# Altium PCB MAX96724_COUPON.PcbDoc (part 1 of 3)
Units mm, origin at the board's own origin, x right, y up, seen from the top; angles counter-clockwise.
Board outline 95 x 90 mm, 4 copper layers (TOP, INT1, INT2, BOT), stack 1.586 mm thick; 171 components, 127 nets, 532 pads, 121 vias.
Unrouted connection lines stored in the file: 1.
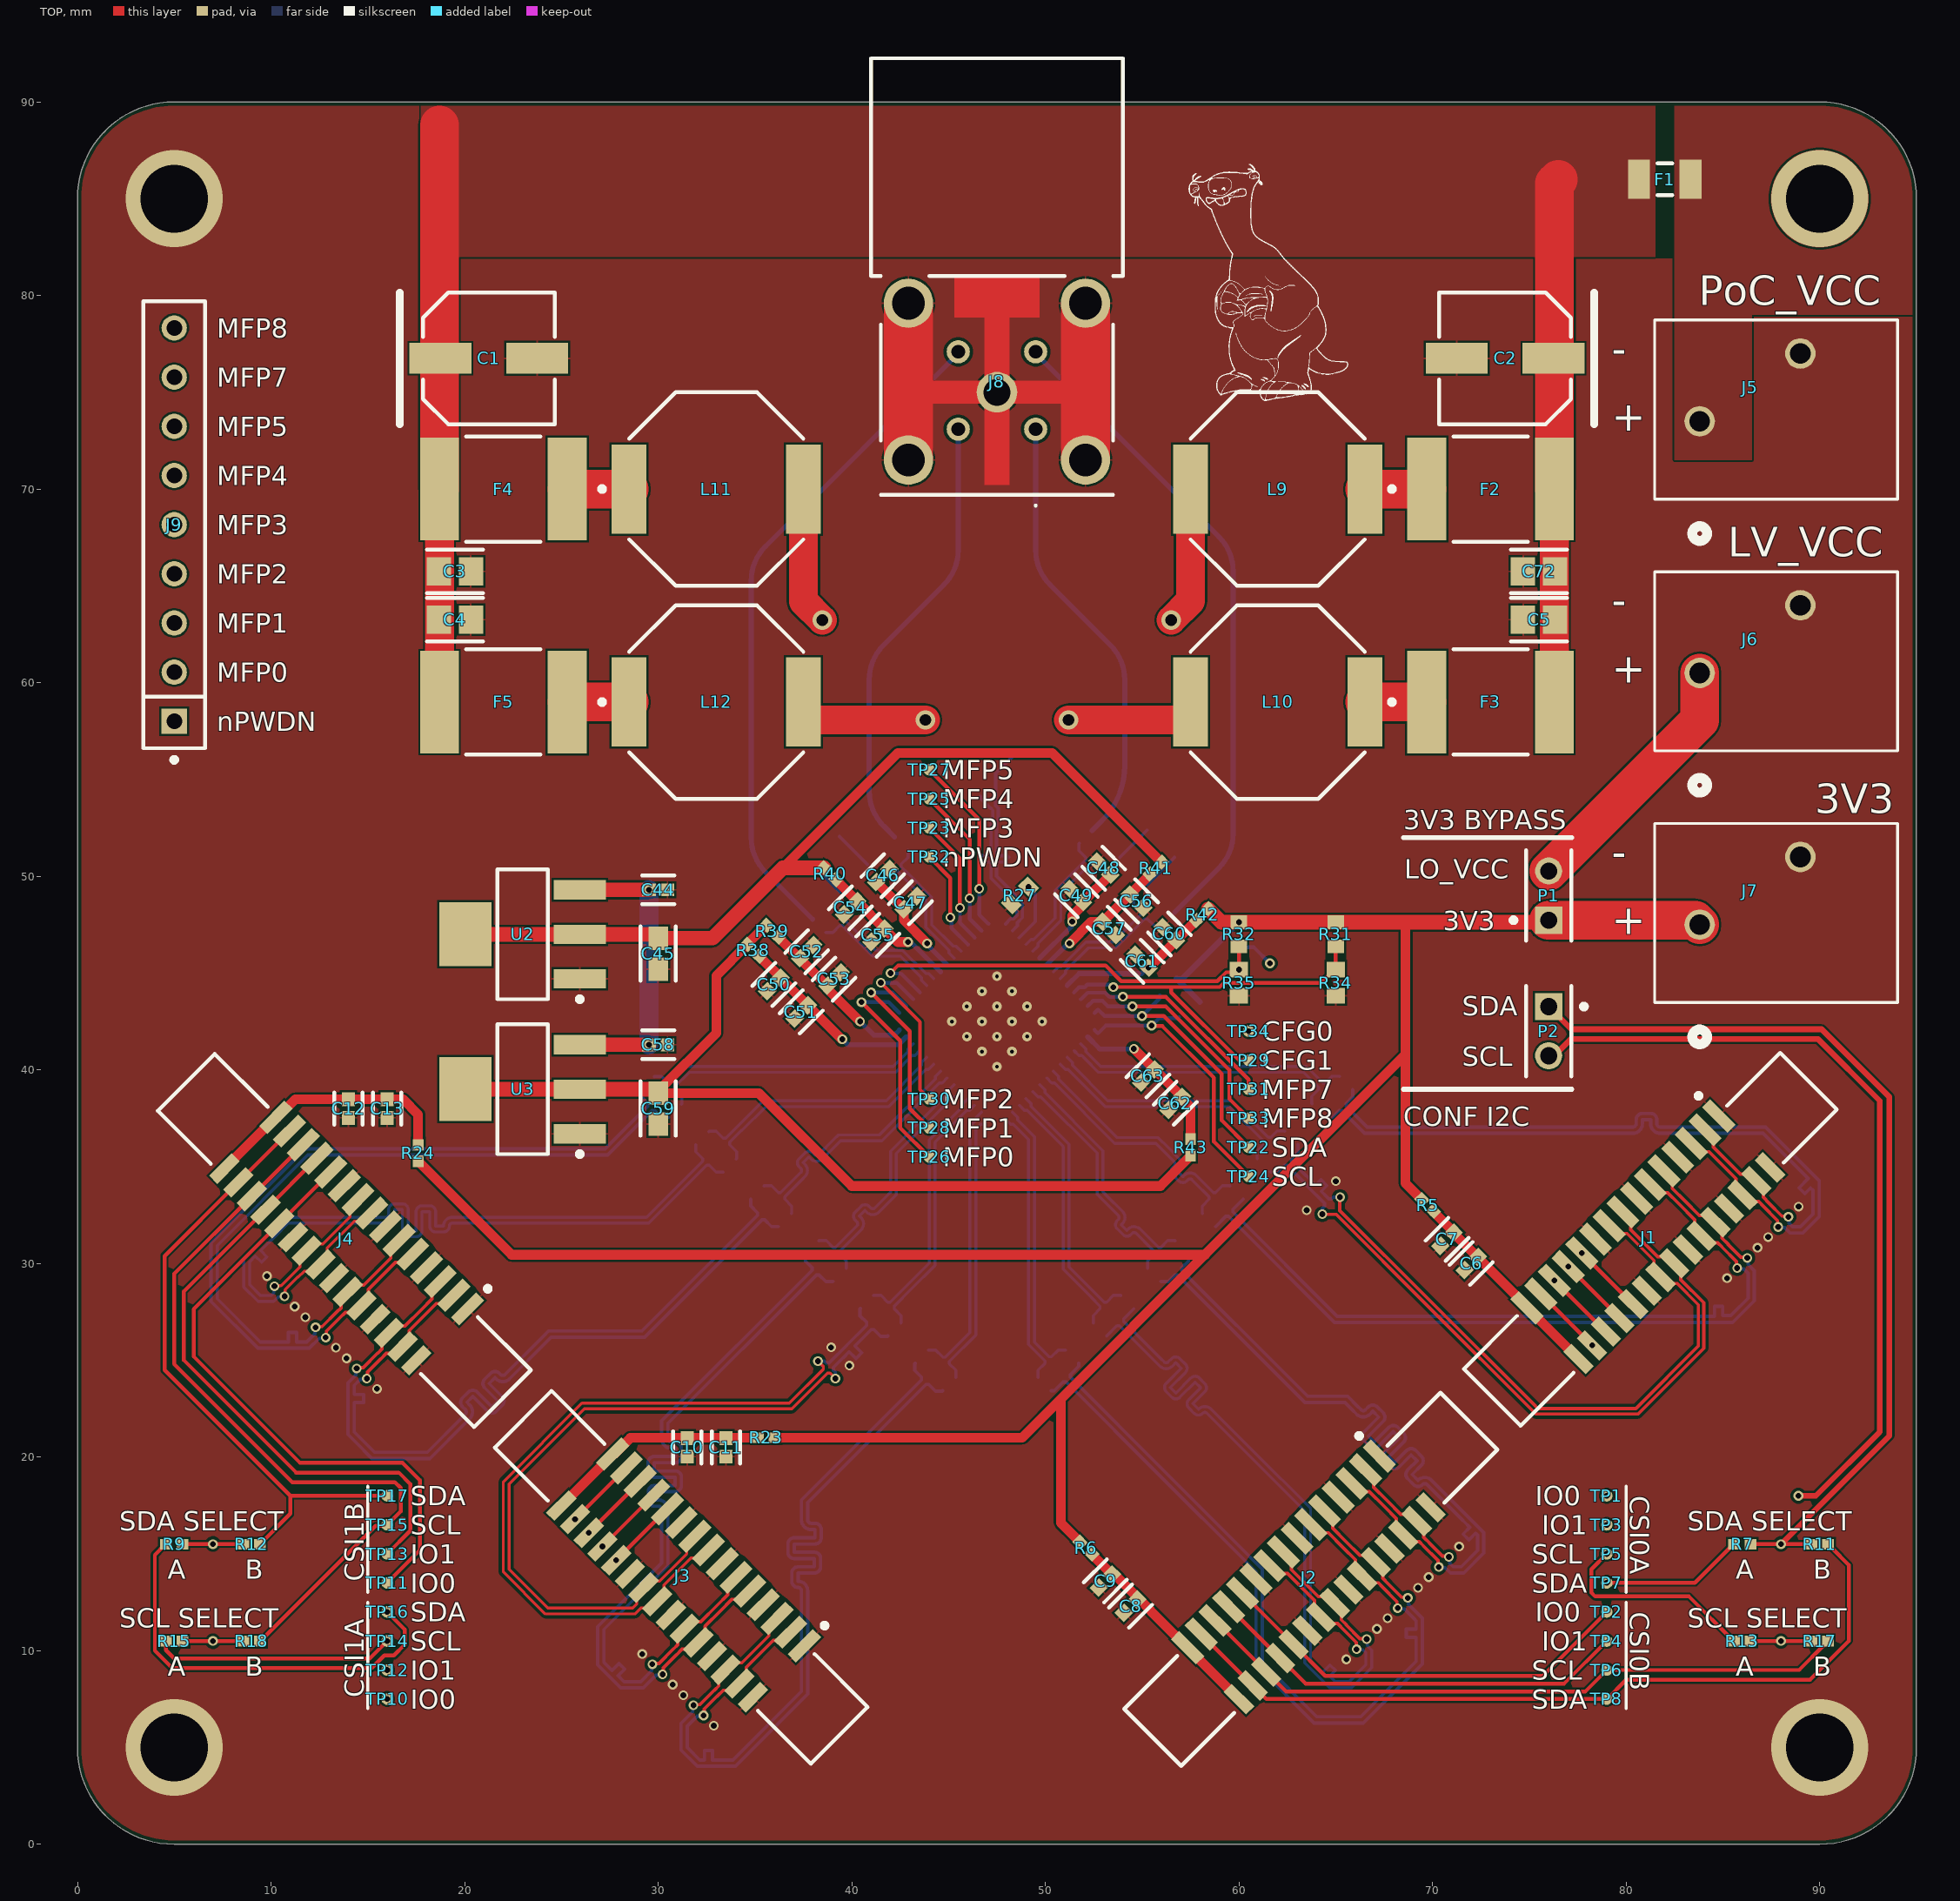
[diagram p0: TOP view]
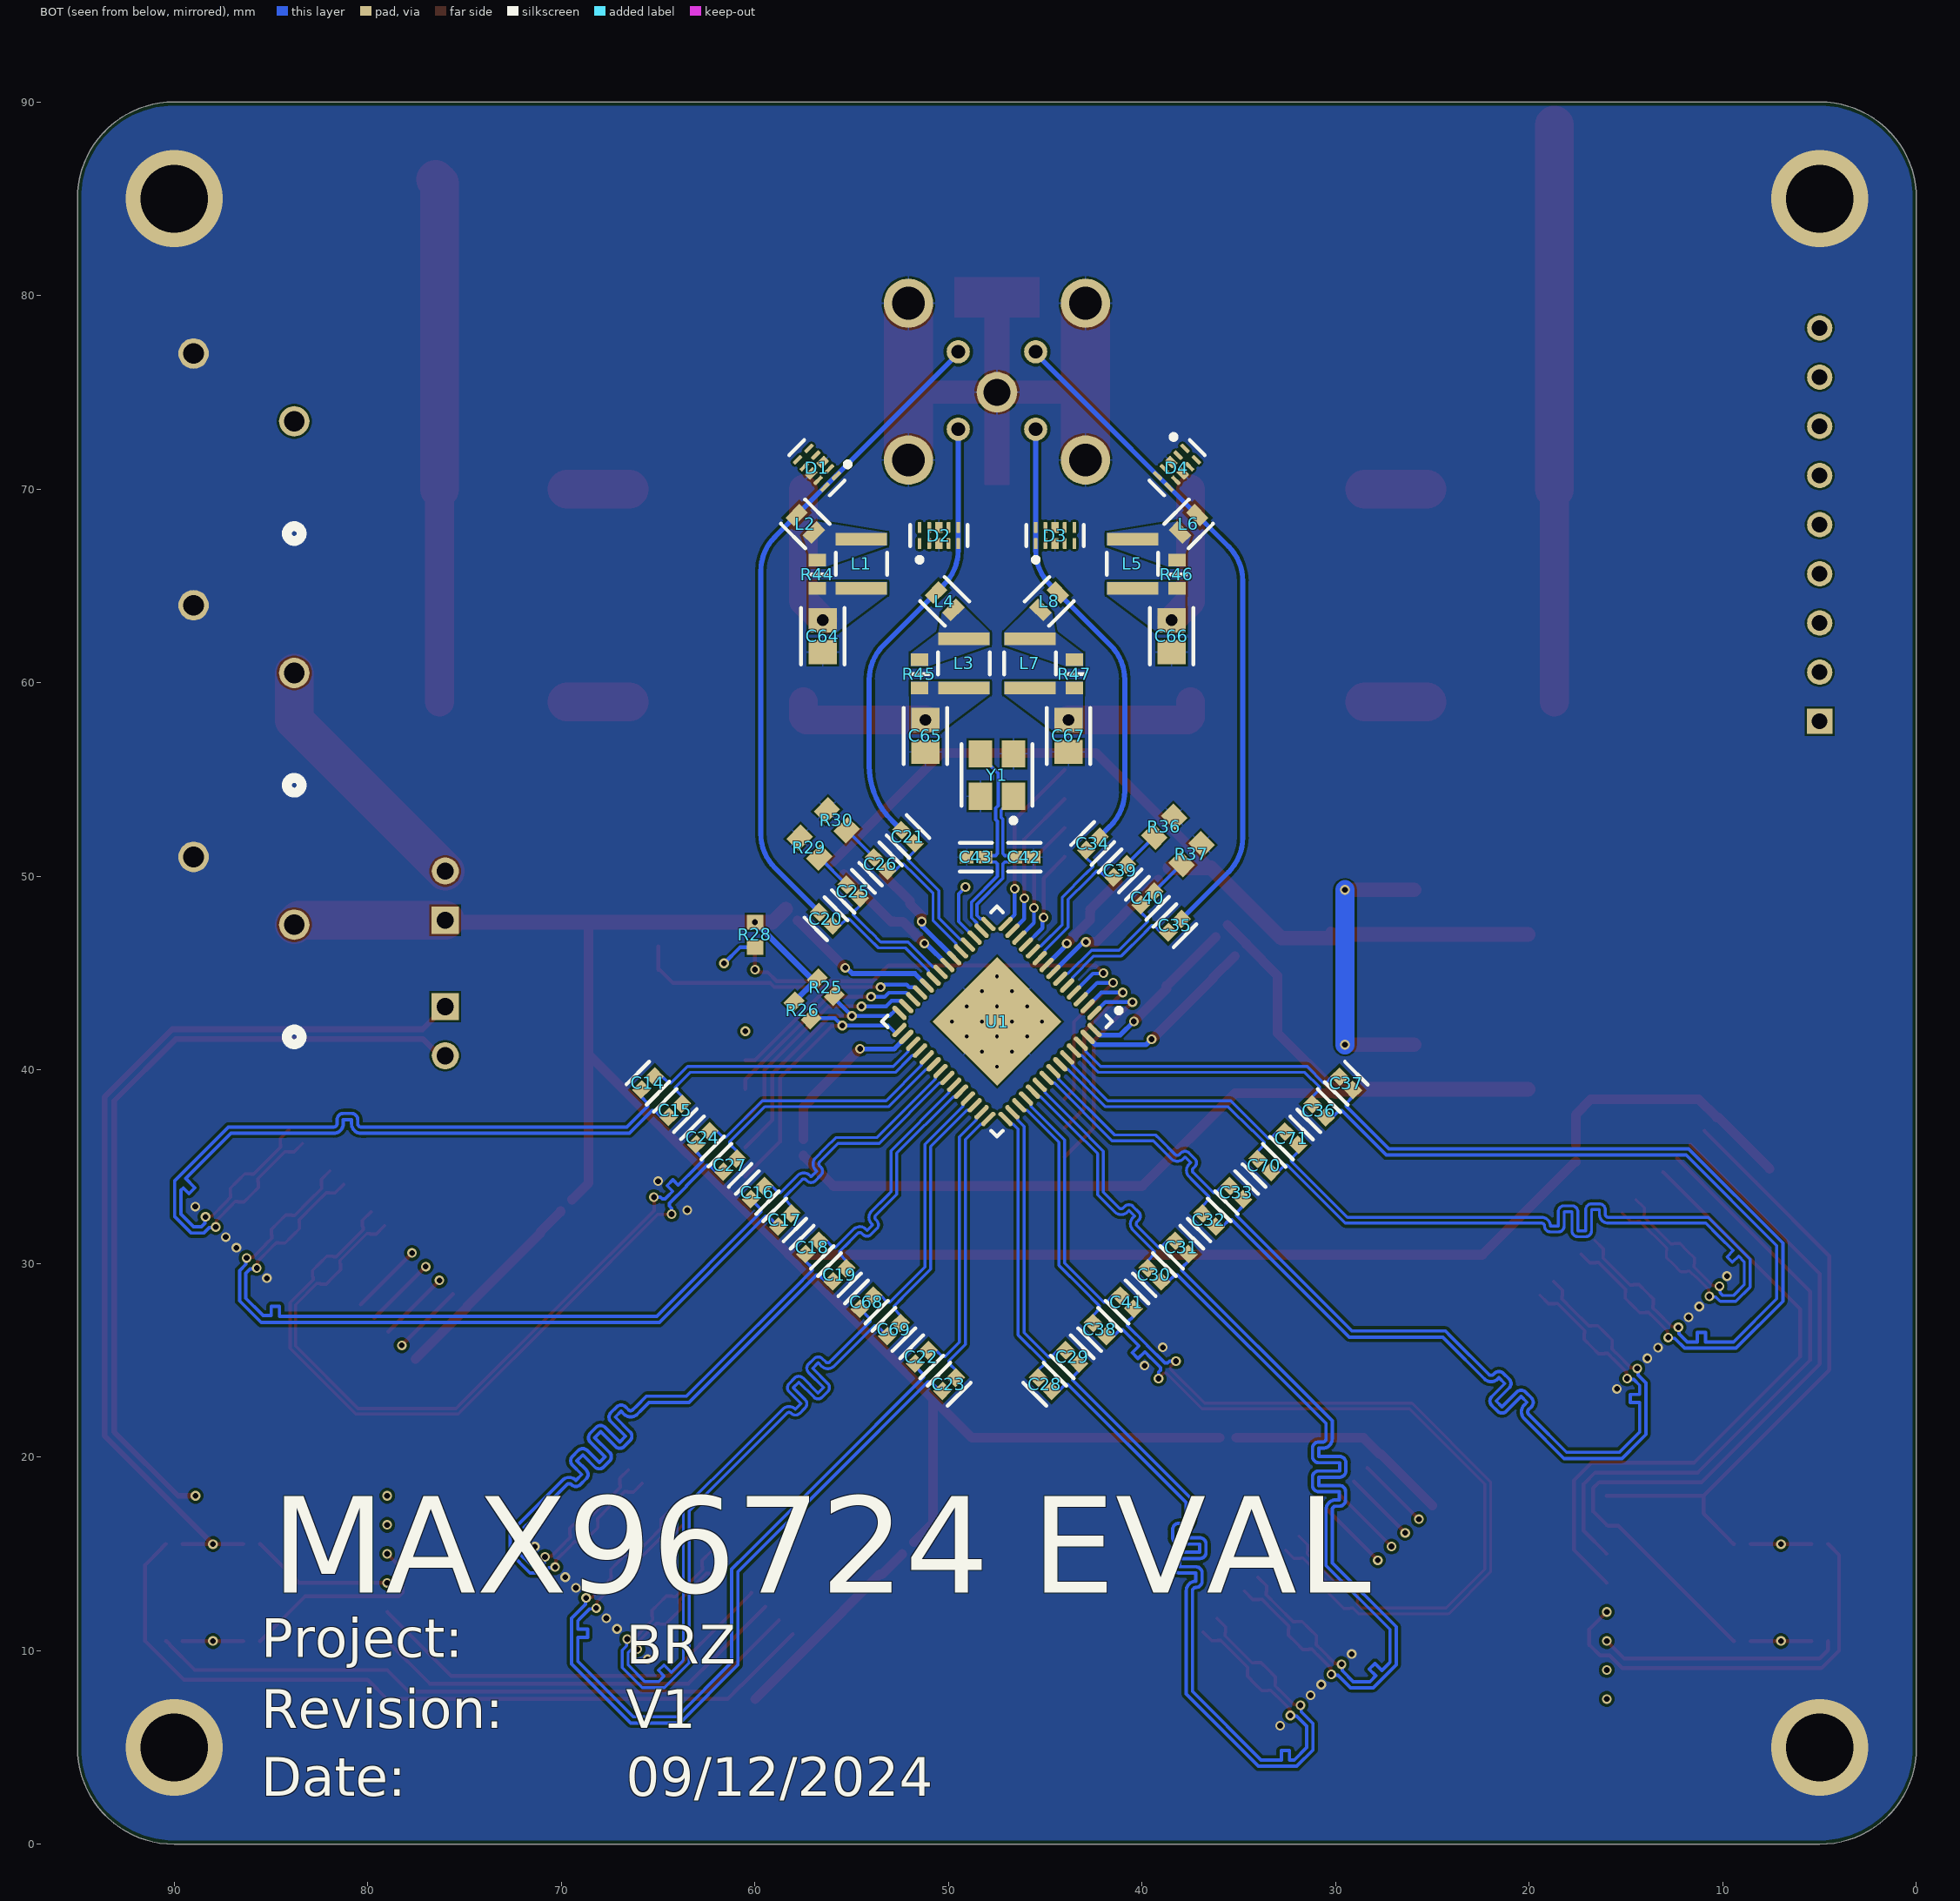
[diagram p1: BOT view, seen from below]
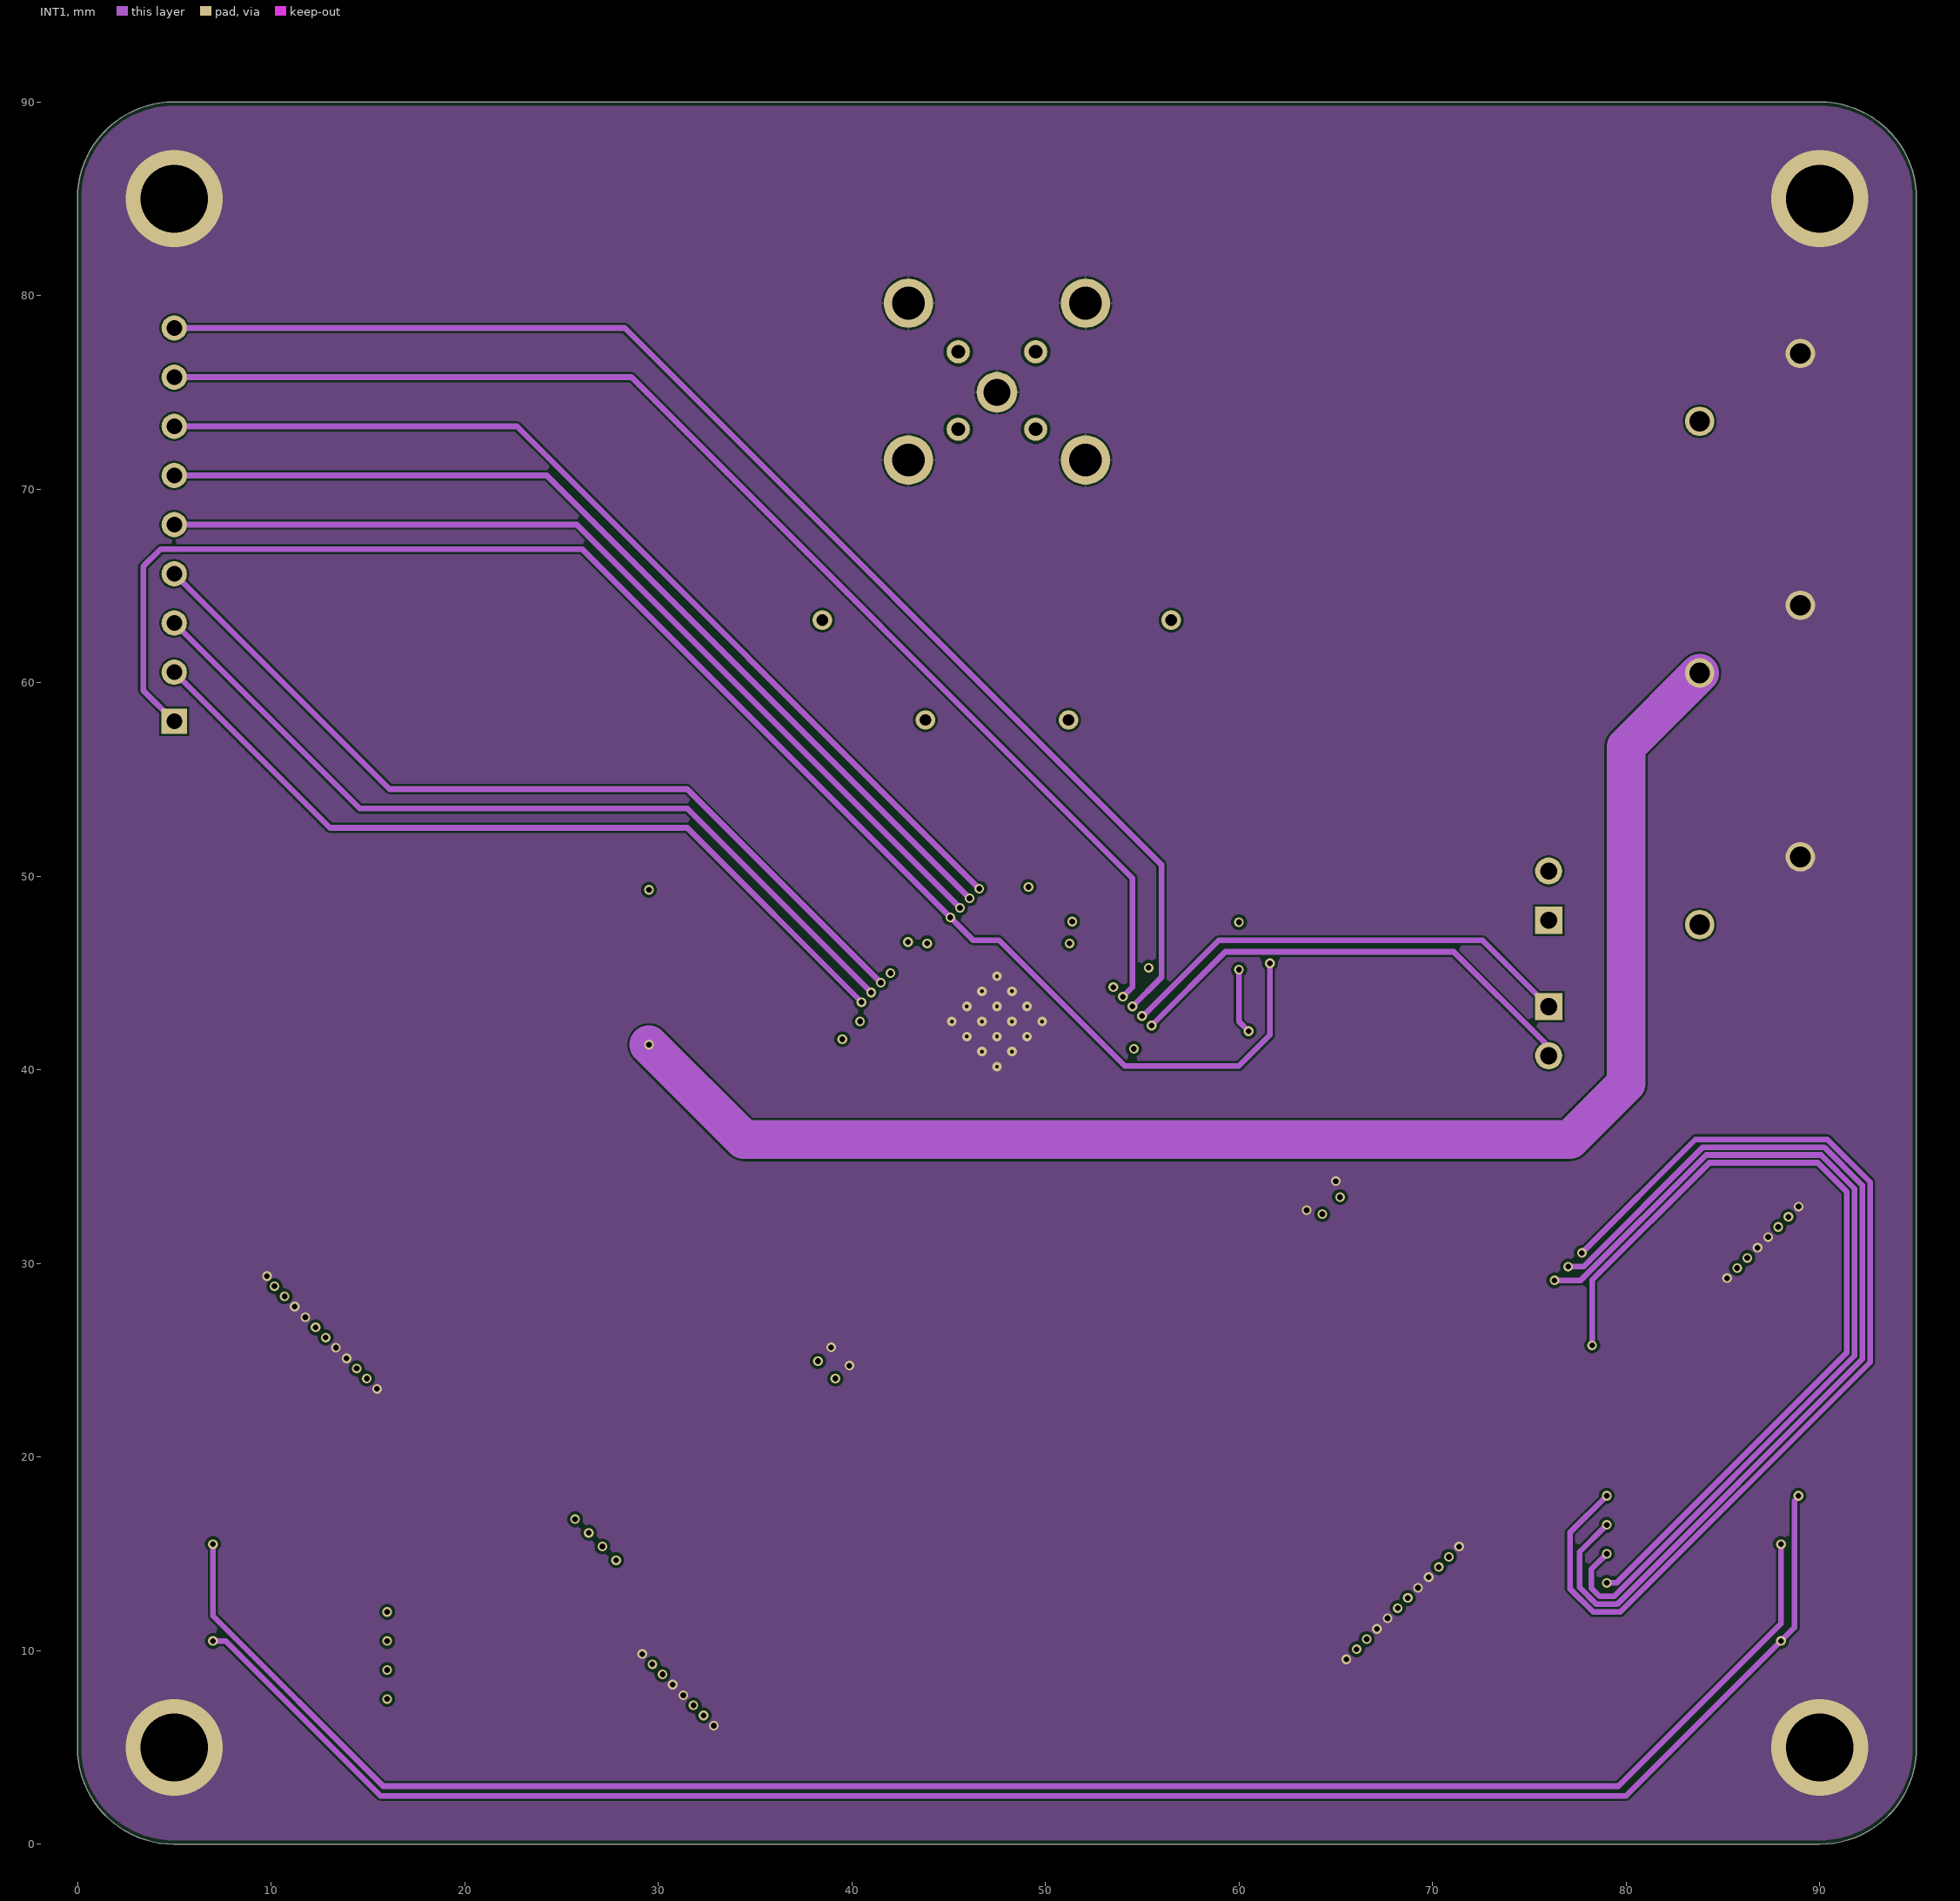
[diagram p2: INT1]
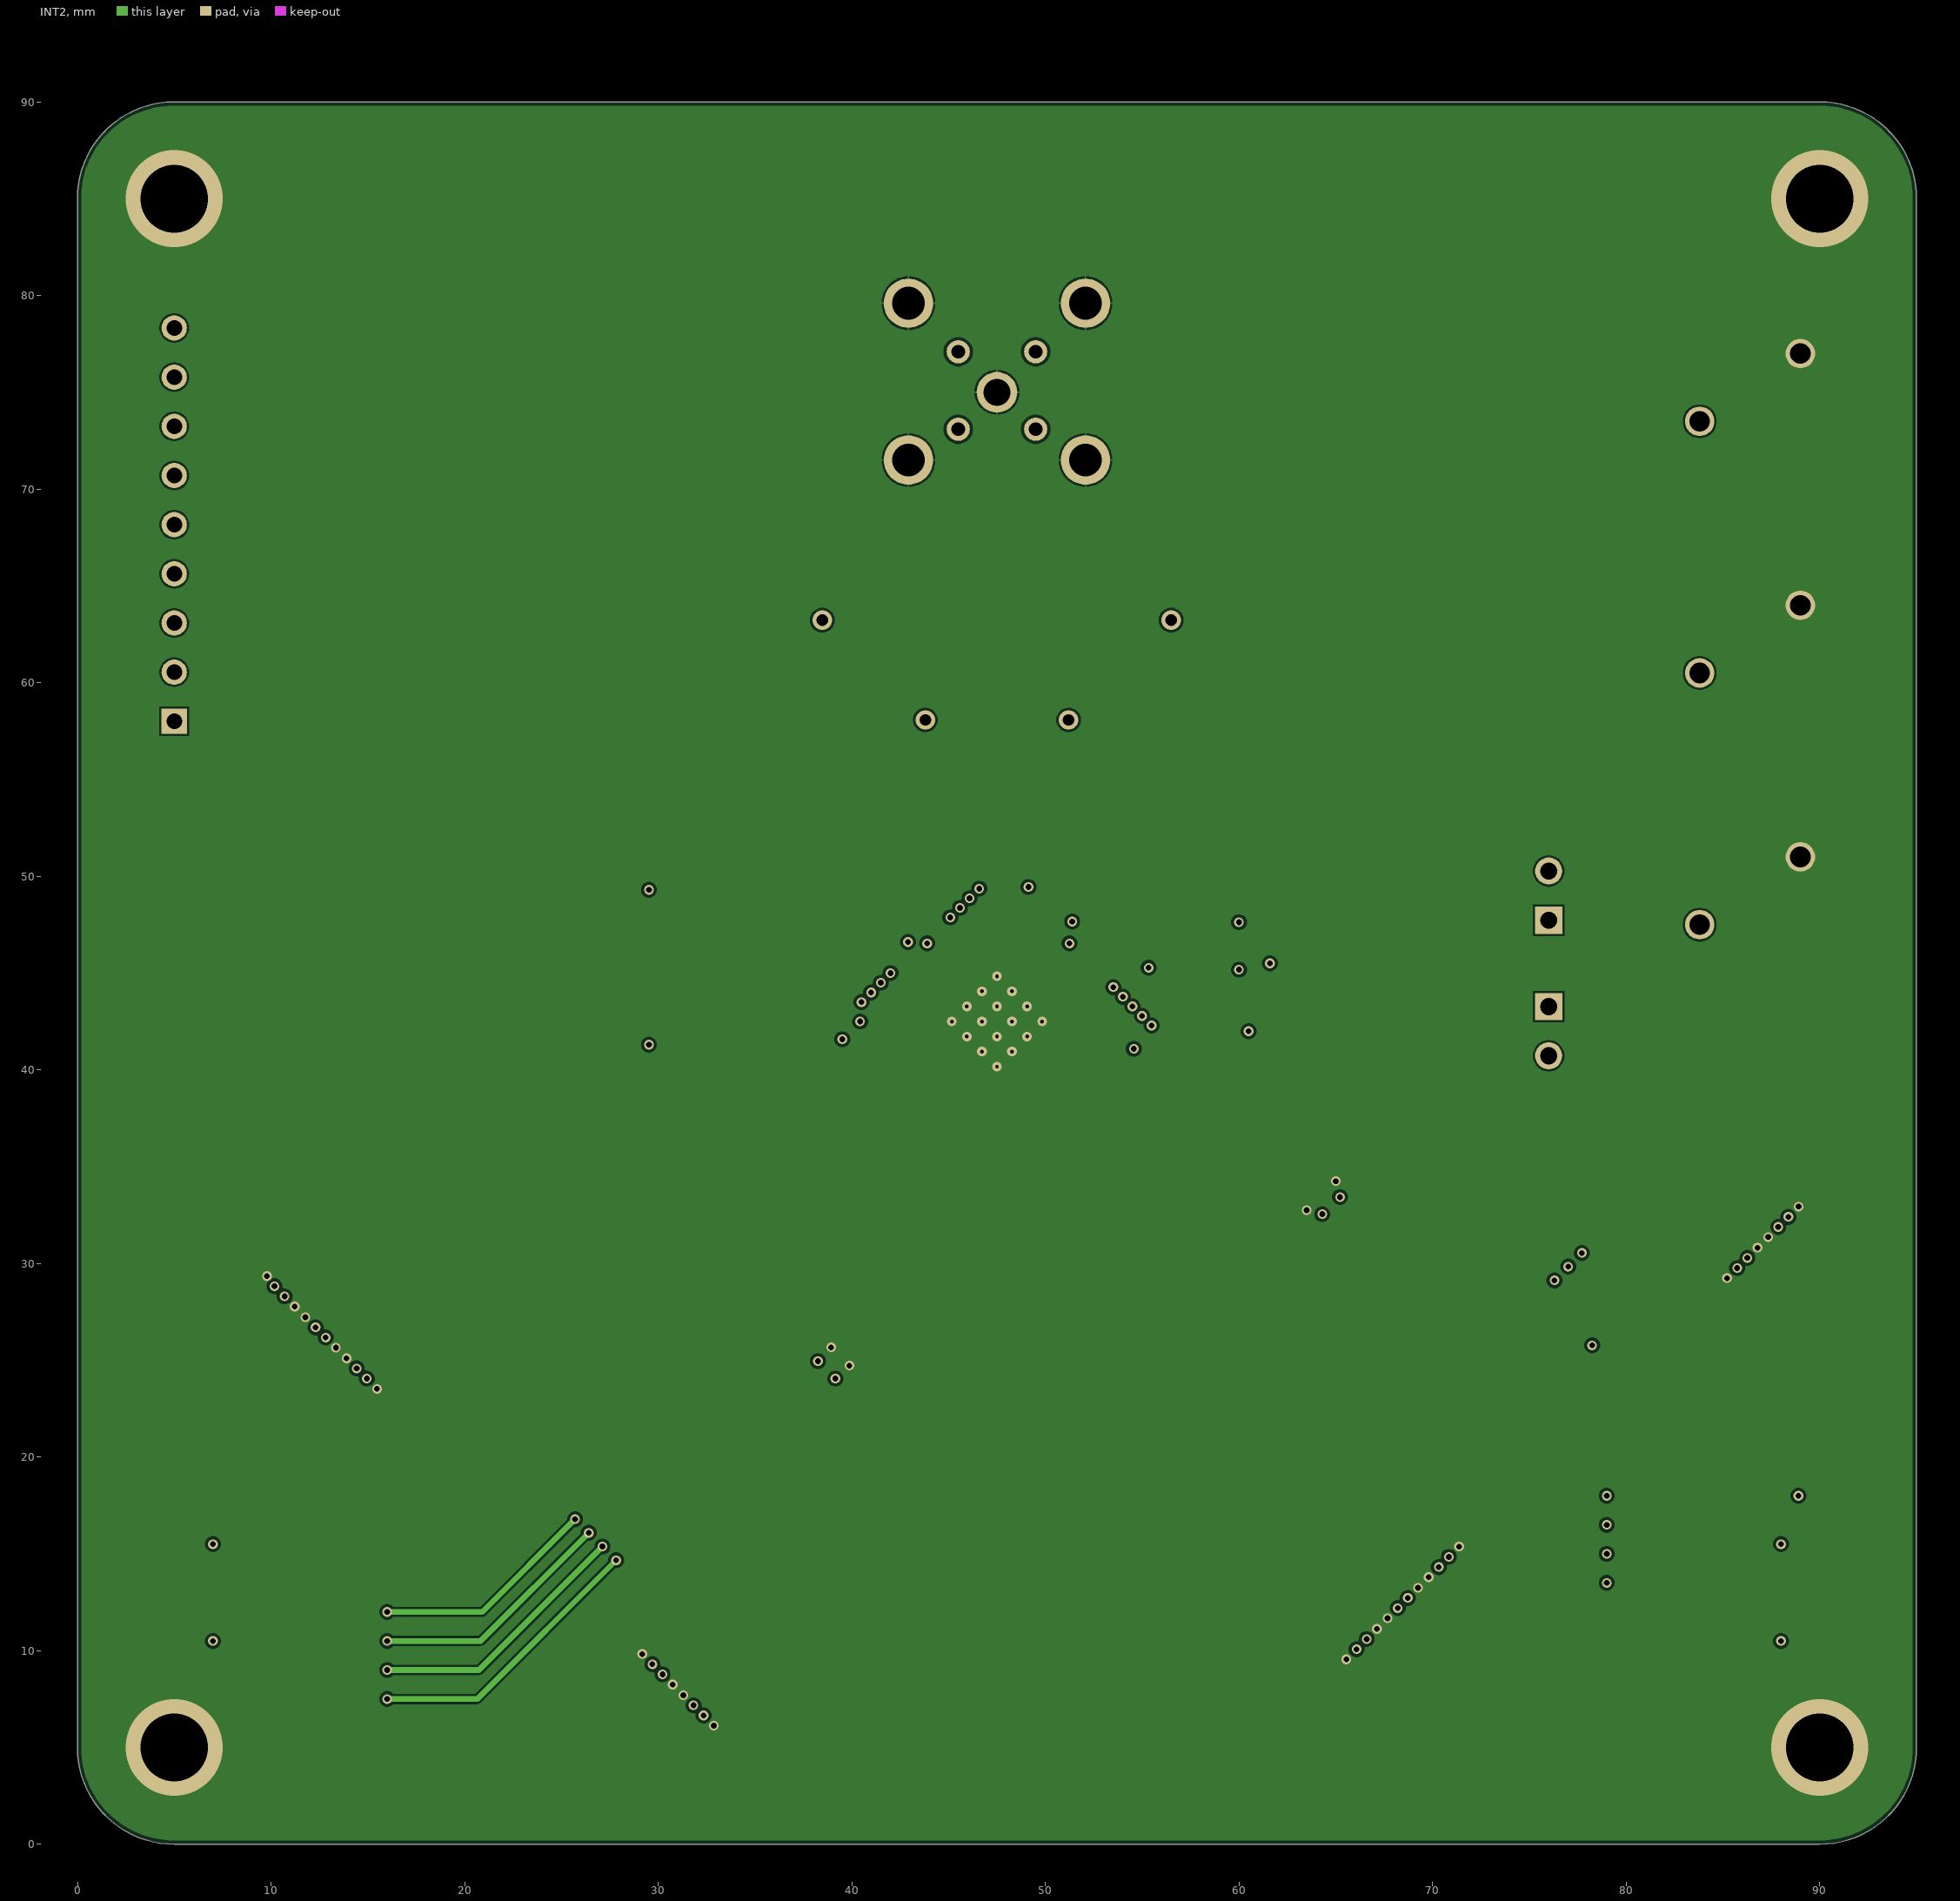
[diagram p3: INT2]
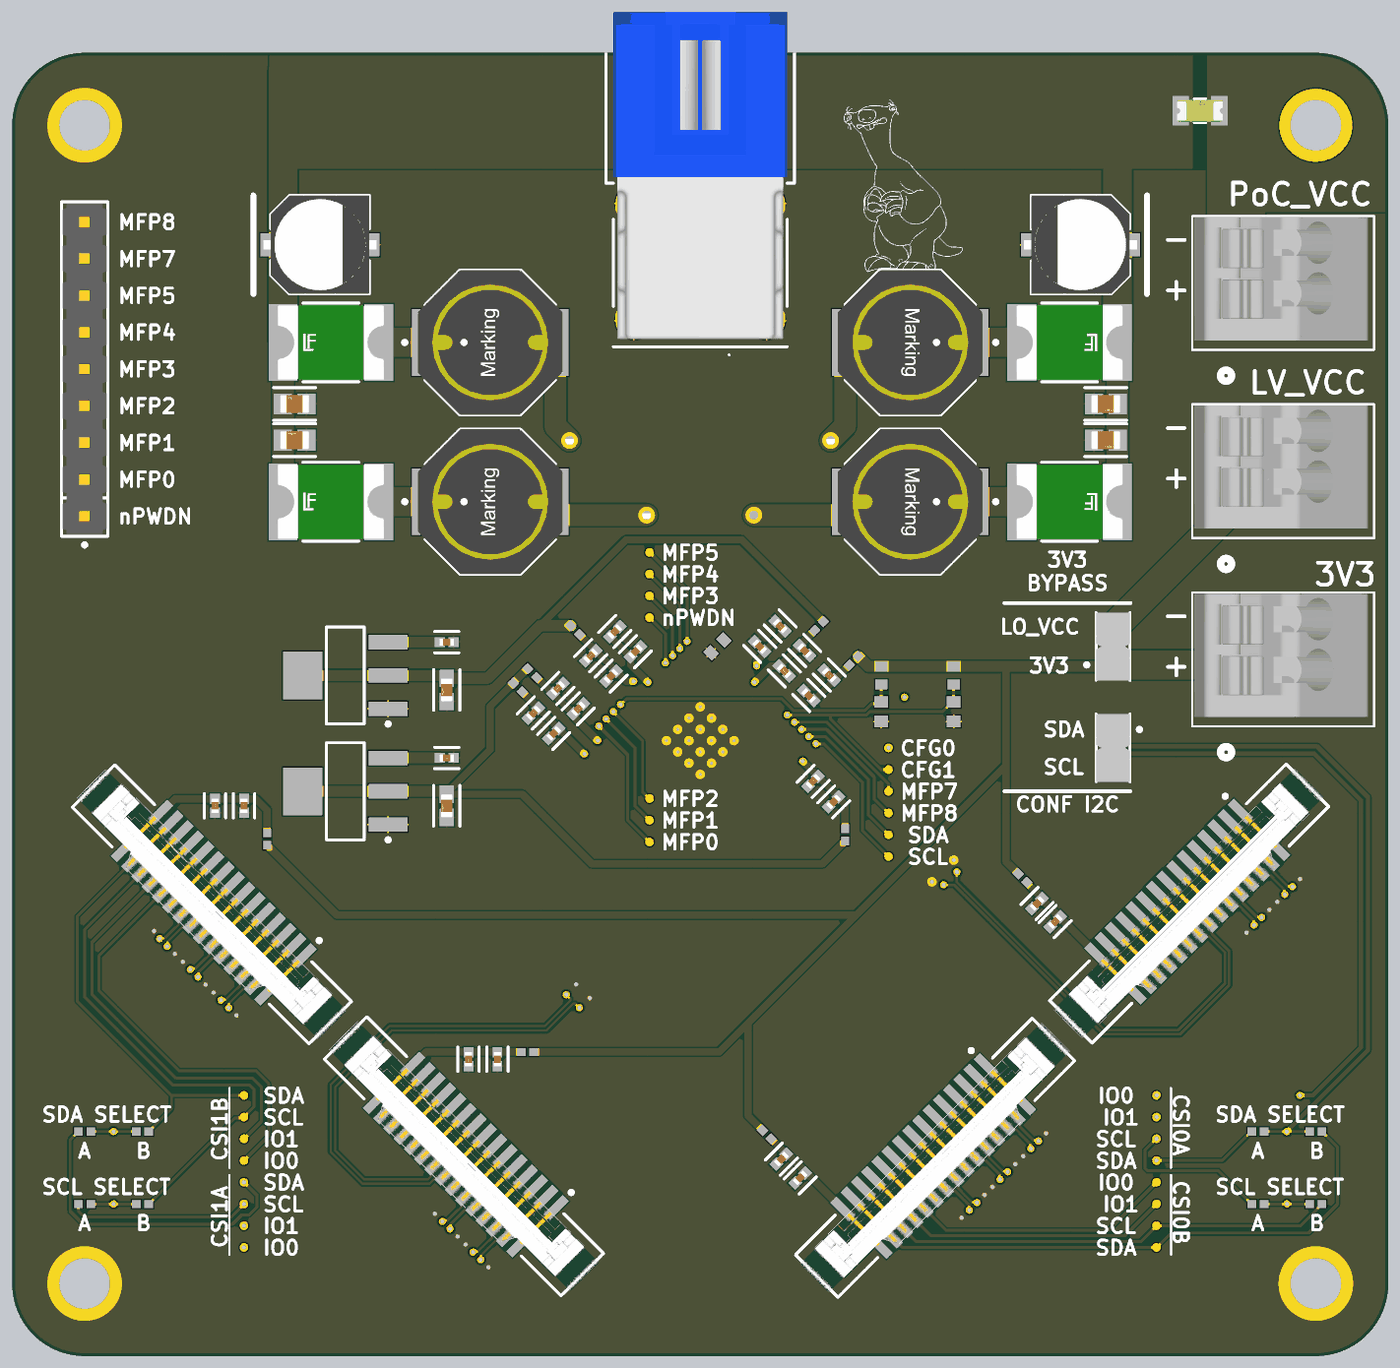
[diagram p5: 3D render of the assembled board from above, using the file's embedded part models]
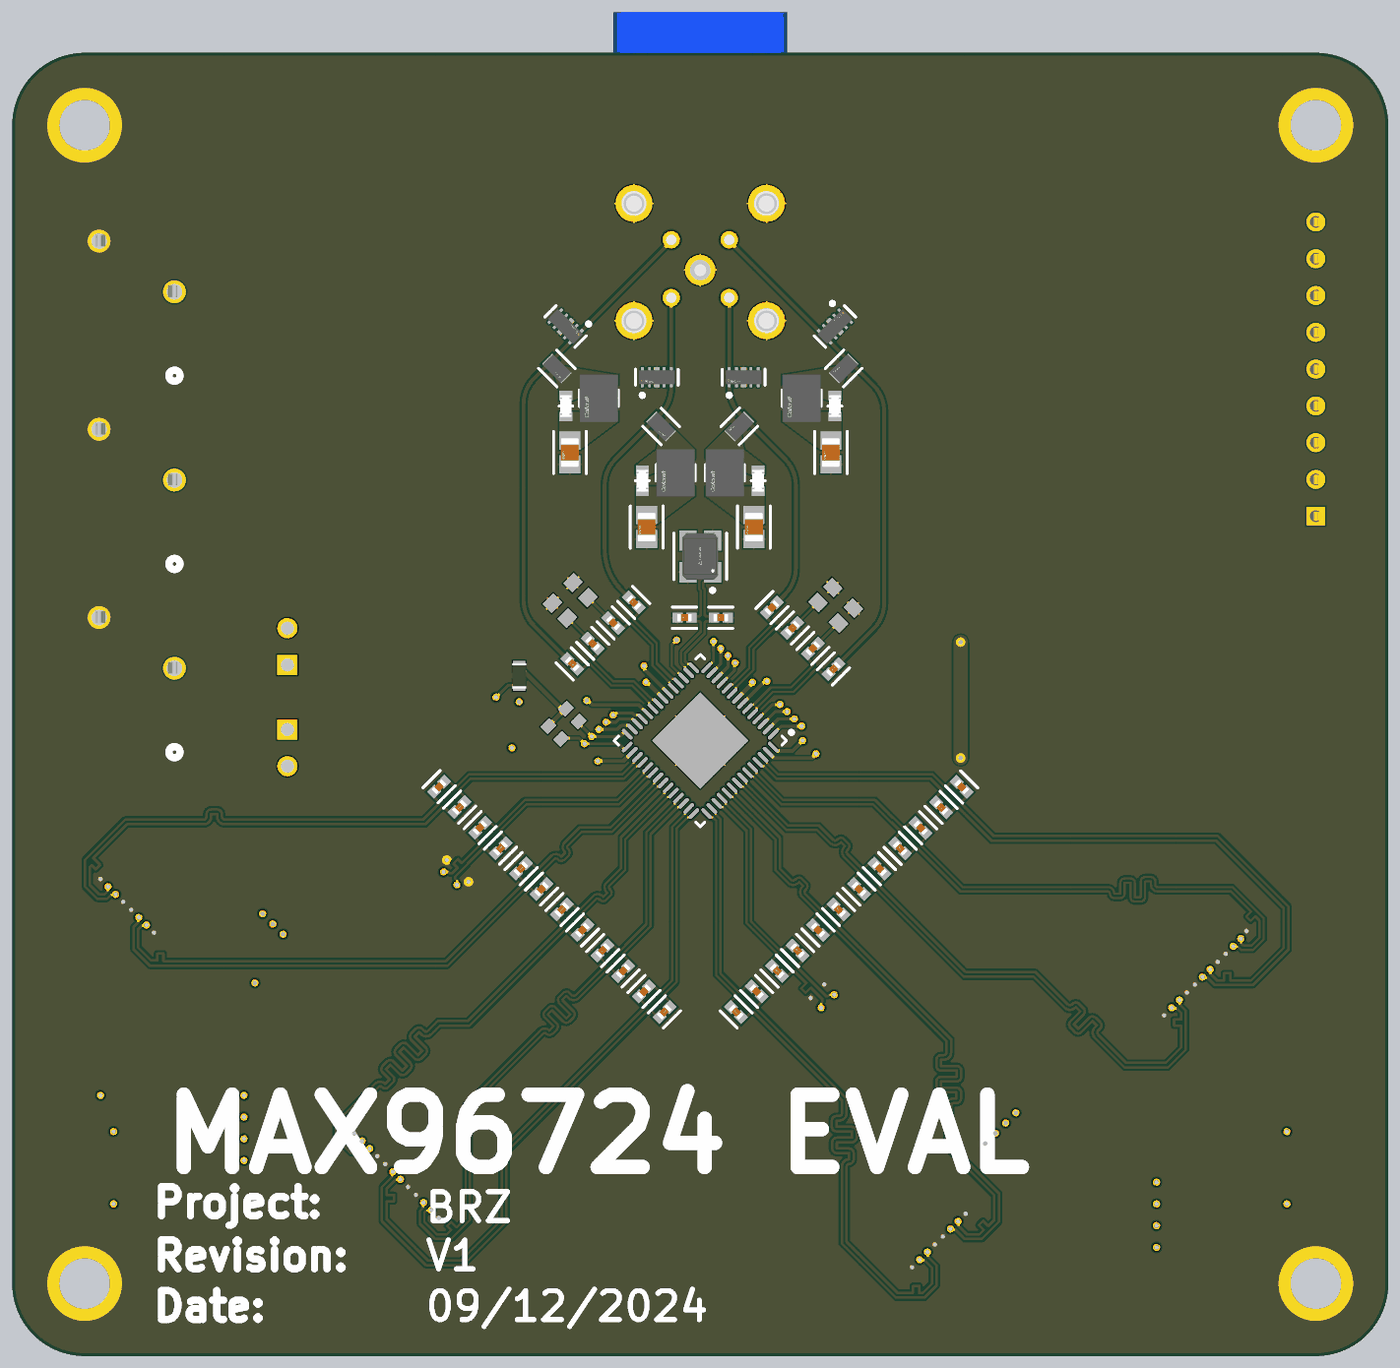
[diagram p6: 3D render of the assembled board from below, using the file's embedded part models]

## Layer stack, top to bottom
Top Solder: solder mask 0.0102, Solder Resist, Dk 3.5
TOP: signal copper 0.035
Dielectric 3: prepreg 0.2104, PP-022, Dk 4.4
INT1: signal copper 0.0152
Dielectric 1: dielectric 1.065, FR-4, Dk 4.6
INT2: signal copper 0.0152
Dielectric 4: prepreg 0.2104, PP-022, Dk 4.4
BOT: signal copper 0.035
Bottom Solder: solder mask 0.0102, Solder Resist, Dk 3.5

## Board outline
5,0 cw(c5,5) 0,5 0,85 cw(c5,85) 5,90 90,90 cw(c90,85) 95,85 95,5 cw(c90,5) 90,0

## Design rules (kind name [scope] priority, off if disabled: settings)
BoardOutlineClearance [All] p1: gap=0.2 ignorepadtopadclearanceinfootprint=FALSE
Clearance IMPEDANCE_CTRL_CLEARANCE [InNetClass('50SINGLE') OR InDifferentialPairClass('100DIFF') OR InDifferentialPairClass('CSI0') OR InDifferentialPairClass('CSI0_PRE') OR InDifferentialPairClass('CSI1') OR InDifferentialPairClass('CSI1_PRE') vs InNet('GND')] p1: gap=0.15 ignorepadtopadclearanceinfootprint=FALSE
Clearance [All] p2: gap=0.102 ignorepadtopadclearanceinfootprint=FALSE except(0.127: Arc-Via Track-Via SMDPad-Via THPad-Via Via-Via Via-Fill Via-Poly Via-Region Via-Text; 0.25: Arc-Hole Track-Hole SMDPad-Hole THPad-Hole Via-Hole Fill-Hole Poly-Hole Region-Hole Text-Hole)
ComponentClearance [All] p1: gap=0.102 collisioncheckmode=3 verticalgap=0.102 showdistances=TRUE
DiffPairsRouting DiffPairsRouting_100DIFF [InDifferentialPairClass('100DIFF') OR InDifferentialPairClass('CSI0') OR InDifferentialPairClass('CSI0_PRE') OR InDifferentialPairClass('CSI1') OR InDifferentialPairClass('CSI1_PRE')] p1: maxlimit=0.15 minlimit=0.127 mostfreqgap=0.15 toplayer_mingap=0.15 toplayer_minwidth=0.152 toplayer_maxwidth=0.152 toplayer_prefwidth=0.152 midlayer1_maxgap=0.127 midlayer1_prefgap=0.127 midlayer1_minwidth=0.092 midlayer1_maxwidth=0.092 midlayer1_prefwidth=0.092 midlayer2_maxgap=0.127 midlayer2_prefgap=0.127 midlayer2_minwidth=0.092 midlayer2_maxwidth=0.092 midlayer2_prefwidth=0.092 bottomlayer_mingap=0.15 bottomlayer_minwidth=0.152 bottomlayer_maxwidth=0.152 bottomlayer_prefwidth=0.152 impedanceprofiledriven=TRUE impedanceprofileid={13D1A9AB-2113-42CE-8DFF-950184DB0145} impedanceprofilevalue=100.000000 maxuncoupledlength=12.7
DiffPairsRouting [All] p2: maxlimit=0.102 minlimit=0.102 mostfreqgap=0.102 toplayer_minwidth=0.102 toplayer_maxwidth=1816.048 toplayer_prefwidth=0.102 midlayer1_minwidth=0.102 midlayer1_maxwidth=1816.048 midlayer1_prefwidth=0.102 midlayer2_minwidth=0.102 midlayer2_maxwidth=1816.048 midlayer2_prefwidth=0.102 bottomlayer_minwidth=0.102 bottomlayer_maxwidth=1816.048 bottomlayer_prefwidth=0.102 maxuncoupledlength=12.7
Height [All] p1: minheight=0 maxheight=1816.048 prefheight=12.7
HoleSize [All] p1: absolutevalues=TRUE maxlimit=6.3 minlimit=0.2 maxpercent=80.000 minpercent=20.000
HoleToHoleClearance [All] p1: gap=0.25 allowstackedmicrovias=FALSE
MatchedLengths CSI_PAIRS_LENGTH_MATCH [InDifferentialPairClass('100DIFF') OR InDifferentialPairClass('CSI0') OR InDifferentialPairClass('CSI0_PRE') OR InDifferentialPairClass('CSI1') OR InDifferentialPairClass('CSI1_PRE')] p1: tolerance=25.4 checknetsindiffpair=TRUE checkdiffpairvsdiffpair=FALSE checkxsignals=FALSE checkothers=FALSE usedelayunits=TRUE delaytolerance=1.000000
MatchedLengths CSI0_LENGH_MATCH [InDifferentialPairClass('CSI0')] p2: tolerance=25.4 checknetsindiffpair=FALSE checkdiffpairvsdiffpair=TRUE checkxsignals=TRUE checkothers=TRUE usedelayunits=TRUE delaytolerance=20.000000
MatchedLengths CSI0PRE_LENGH_MATCH [InDifferentialPairClass('CSI0_PRE')] p3: tolerance=25.4 checknetsindiffpair=FALSE checkdiffpairvsdiffpair=TRUE checkxsignals=TRUE checkothers=TRUE usedelayunits=TRUE delaytolerance=20.000000
MatchedLengths CSI1_LENGH_MATCH [InDifferentialPairClass('CSI1')] p4: tolerance=25.4 checknetsindiffpair=FALSE checkdiffpairvsdiffpair=TRUE checkxsignals=TRUE checkothers=TRUE usedelayunits=TRUE delaytolerance=20.000000
MatchedLengths CSI1PRE_LENGH_MATCH [InDifferentialPairClass('CSI1_PRE')] p5: tolerance=25.4 checknetsindiffpair=FALSE checkdiffpairvsdiffpair=TRUE checkxsignals=TRUE checkothers=TRUE usedelayunits=TRUE delaytolerance=20.000000
MinimumAnnularRing [All] p1: minimumring=0.076
MinimumSolderMaskSliver [All] p1: minsoldermaskwidth=0
PlaneClearance [All] p1: clearance=0.102
PlaneConnect PlaneConnectPowerPads [InPadClass('PowerPads')] p1: planeconnectstyle=Direct reliefexpansion=0.508 reliefentries=4 reliefconductorwidth=0.254 reliefairgap=0.254
PlaneConnect [All] p2: pad.planeconnectstyle=Relief pad.reliefexpansion=0.3 pad.reliefentries=4 pad.reliefconductorwidth=0.102 pad.reliefairgap=0.102 via.planeconnectstyle=Direct via.reliefexpansion=0.3 via.reliefentries=4 via.reliefconductorwidth=0.127 via.reliefairgap=0.127
PolygonConnect PolygonConnectPowerPads [InNetClass('PWR')] p1: connectstyle=Direct reliefconductorwidth=0.254 reliefentries=4 polygonreliefangle="90 Angle" airgapwidth=0.254
PolygonConnect PolygonConnect_PWR_CONNs [HasFootprint('1-2834011-2-Footprint-1')] p2: connectstyle=Direct reliefconductorwidth=0.102 reliefentries=4 polygonreliefangle="90 Angle" airgapwidth=0.102
PolygonConnect [All] p3: thpad.connectstyle=Relief thpad.reliefconductorwidth=0.102 thpad.reliefentries=4 thpad.polygonreliefangle="90 Angle" thpad.airgapwidth=0.102 smdpad.connectstyle=Relief smdpad.reliefconductorwidth=0.102 smdpad.reliefentries=4 smdpad.polygonreliefangle="90 Angle" smdpad.airgapwidth=0.102 via.connectstyle=Direct via.reliefconductorwidth=0.127 via.reliefentries=4 via.polygonreliefangle="90 Angle" via.airgapwidth=0.127
RoutingVias [All] p1: holewidth=0.2 width=0.45 viastyle="Through Hole" minholewidth=0.2 minwidth=0.45 maxholewidth=6.3 maxwidth=6.55
SilkToSilkClearance [All] p1: silktosilkclearance=0
SilkToSolderMaskClearance [IsPad] p1: minsilkscreentomaskgap=0.102 clearancetoexposedcopper=TRUE
SolderMaskExpansion [All] p1: expansion=0.075 istentingtop=FALSE
Width Width_50SINGLE [InNetClass('50SINGLE')] p1: maxlimit=0.261 minlimit=0.181 preferedwidth=0.261 toplayer_minwidth=0.261 midlayer1_maxwidth=0.181 midlayer1_prefwidth=0.181 midlayer2_maxwidth=0.181 midlayer2_prefwidth=0.181 bottomlayer_minwidth=0.261 impedanceprofiledriven=TRUE impedanceprofileid={F0F446AF-9D69-427E-851C-CC714E0DDE48} impedanceprofilevalue=50.000000 minimp=50.000000 maximp=50.000000 favimp=50.000000
Width [All] p2: maxlimit=1816.048 minlimit=0.102 preferedwidth=0.102
20 further rules are at their usual default settings.

## Classes and differential pairs
differential pair class 100DIFF: J3 J4 SIOA SIOB SIOC SIOD
differential pair class CSI1_PRE: CSI1_CK CSI1_CKALT CSI1_D0 CSI1_D1 CSI1_D2 CSI1_D3
differential pair class CSI1: CKB CKF DB0 DB1 DB2 DB3
differential pair class CSI0: CKA CKC DA0 DA1 DA2 DA3
net class PWR: 3V3_AUX LO_VCC NetC64_1 NetC65_1 NetC66_1 NetC67_1 NetF2_2 NetF3_2 NetF4_2 NetF5_2 NetL1_2 NetL3_2 NetL5_2 NetL7_2 PoC_PWR VCC
differential pair class CSI0_PRE: CSI0_CK CSI0_CKALT CSI0_D0 CSI0_D1 CSI0_D2 CSI0_D3 J1 J2
net class 50SINGLE: PoC_A PoC_B PoC_C PoC_D
component class MAX96724_COUPON: C1 C2 C3 C4 C5 C6 C7 C8 C9 C10 C11 C12 C13 C72 F1 J1 J2 J3 J4 J5 J6 J7 J9 P1 P2 R5 R6 R7 R9 R11 R12 R13 R15 R17 R18 R23 R24 TP1 TP2 TP3 TP4 TP5 TP6 TP7 TP8 TP10 TP11 TP12 TP13 TP14 TP15 TP16 TP17
component class GMSL_DESERIALIZER_0: C14 C15 C16 C17 C18 C19 C20 C21 C22 C23 C24 C25 C26 C27 C28 C29 C30 C31 C32 C33 C34 C35 C36 C37 C38 C39 C40 C41 C42 C43 C44 C45 C46 C47 C48 C49 C50 C51 C52 C53 C54 C55 C56 C57 C58 C59 C60 C61 C62 C63 C64 C65 C66 C67 C68 C69 C70 C71 D1 D2 D3 D4 F2 F3 F4 F5 J8 L1 L2 L3 L4 L5 L6 L7 L8 L9 L10 L11 L12 R25 R26 R27 R28 R29 R30 R31 R32 R34 R35 R36 R37 R38 R39 R40 R41 R42 R43 R44 R45 R46 R47 TP22 TP23 TP24 TP25 TP26 TP27 TP28 TP29 TP30 TP31 TP32 TP33 TP34 U1 U2 U3 Y1
differential pair CSI1_CKALT: +CSI1_CKALT_P -CSI1_CKALT_N
differential pair CSI0_CKALT: +CSI0_CKALT_P -CSI0_CKALT_N
differential pair X25: +X25_P -X25_N
differential pair SIOD: +SIOD_P -SIOD_N
differential pair SIOC: +SIOC_P -SIOC_N
differential pair SIOB: +SIOB_P -SIOB_N
differential pair SIOA: +SIOA_P -SIOA_N
differential pair DB3: +DB3_P -DB3_N
differential pair DB2: +DB2_P -DB2_N
differential pair DB1: +DB1_P -DB1_N
differential pair DB0: +DB0_P -DB0_N
differential pair DA3: +DA3_P -DA3_N
differential pair DA2: +DA2_P -DA2_N
differential pair DA1: +DA1_P -DA1_N
differential pair DA0: +DA0_P -DA0_N
differential pair CSI1_D3: +CSI1_D3_P -CSI1_D3_N
differential pair CSI1_D2: +CSI1_D2_P -CSI1_D2_N
differential pair CSI1_D1: +CSI1_D1_P -CSI1_D1_N
differential pair CSI1_D0: +CSI1_D0_P -CSI1_D0_N
differential pair CSI1_CK: +CSI1_CK_P -CSI1_CK_N
differential pair CSI0_D3: +CSI0_D3_P -CSI0_D3_N
differential pair CSI0_D2: +CSI0_D2_P -CSI0_D2_N
differential pair CSI0_D1: +CSI0_D1_P -CSI0_D1_N
differential pair CSI0_D0: +CSI0_D0_P -CSI0_D0_N
differential pair CSI0_CK: +CSI0_CK_P -CSI0_CK_N
differential pair CKF: +CKF_P -CKF_N
differential pair CKC: +CKC_P -CKC_N
differential pair CKB: +CKB_P -CKB_N
differential pair CKA: +CKA_P -CKA_N

## Components (designator, comment, footprint, x,y, rotation, side; value= is the part's Value field where it differs from the comment)
C1 "EEEFK1E101XP" PNSC-FK-V-D8_V 21.25,76.75 r0 top
C2 "EEEFK1E101XP" PNSC-FK-V-D8_V 73.75,76.75 r180 top
C3 "GRM21BR61E226ME44L" FP-GRM21B-0_2-e0_2_0_7-IPC_B 19.5,65.75 r180 top
C4 "GRM21BR61E226ME44L" FP-GRM21B-0_2-e0_2_0_7-IPC_B 19.5,63.25 r180 top
C5 "GRM21BR61E226ME44L" FP-GRM21B-0_2-e0_2_0_7-IPC_B 75.5,63.25 r0 top
C6 "100n" FP-0402-L_1_0_0_05-W_0_5-IPC_A 72,30 r225 top
C7 "10u" FP-0402-L_1_0_0_05-W_0_5-IPC_A 70.75,31.25 r225 top
C8 "100n" FP-0402-L_1_0_0_05-W_0_5-IPC_A 54.4,12.3 r225 top
C9 "10u" FP-0402-L_1_0_0_05-W_0_5-IPC_A 53.1,13.6 r225 top
C10 "100n" FP-0402-L_1_0_0_05-W_0_5-IPC_A 31.5,20.5 r270 top
C11 "10u" FP-0402-L_1_0_0_05-W_0_5-IPC_A 33.5,20.5 r270 top
C12 "100n" FP-0402-L_1_0_0_05-W_0_5-IPC_A 14,38 r270 top
C13 "10u" FP-0402-L_1_0_0_05-W_0_5-IPC_A 16,38 r270 top
C14 "100n" FP-0402-L_1_0_0_05-W_0_5-IPC_A 65.531,39.318 r315 bottom
C15 "100n" FP-0402-L_1_0_0_05-W_0_5-IPC_A 64.117,37.904 r315 bottom
C16 "100n" FP-0402-L_1_0_0_05-W_0_5-IPC_A 59.874,33.661 r315 bottom
C17 "100n" FP-0402-L_1_0_0_05-W_0_5-IPC_A 58.46,32.247 r315 bottom
C18 "100n" FP-0402-L_1_0_0_05-W_0_5-IPC_A 57.046,30.833 r315 bottom
C19 "100n" FP-0402-L_1_0_0_05-W_0_5-IPC_A 55.632,29.419 r315 bottom
C20 "220n" FP-0402-L_1_0_0_05-W_0_5-IPC_A 56.339,47.803 r45 bottom
C21 "220n" FP-0402-L_1_0_0_05-W_0_5-IPC_A 52.096,52.046 r45 bottom
C22 "100n" FP-0402-L_1_0_0_05-W_0_5-IPC_A 51.389,25.176 r315 bottom
C23 "100n" FP-0402-L_1_0_0_05-W_0_5-IPC_A 49.975,23.762 r315 bottom
C24 "100n" FP-0402-L_1_0_0_05-W_0_5-IPC_A 62.703,36.49 r315 bottom
C25 "220n" FP-0402-L_1_0_0_05-W_0_5-IPC_A 54.925,49.218 r45 bottom
C26 "220n" FP-0402-L_1_0_0_05-W_0_5-IPC_A 53.51,50.632 r45 bottom
C27 "100n" FP-0402-L_1_0_0_05-W_0_5-IPC_A 61.289,35.075 r315 bottom
C28 "100n" FP-0402-L_1_0_0_05-W_0_5-IPC_A 45.025,23.762 r225 bottom
C29 "100n" FP-0402-L_1_0_0_05-W_0_5-IPC_A 43.611,25.176 r225 bottom
C30 "100n" FP-0402-L_1_0_0_05-W_0_5-IPC_A 39.368,29.419 r225 bottom
C31 "100n" FP-0402-L_1_0_0_05-W_0_5-IPC_A 37.954,30.833 r225 bottom
C32 "100n" FP-0402-L_1_0_0_05-W_0_5-IPC_A 36.54,32.247 r225 bottom
C33 "100n" FP-0402-L_1_0_0_05-W_0_5-IPC_A 35.126,33.661 r225 bottom
C34 "220n" FP-0402-L_1_0_0_05-W_0_5-IPC_A 42.55,51.692 r135 bottom
C35 "220n" FP-0402-L_1_0_0_05-W_0_5-IPC_A 38.308,47.45 r135 bottom
C36 "100n" FP-0402-L_1_0_0_05-W_0_5-IPC_A 30.868,37.889 r225 bottom
C37 "100n" FP-0402-L_1_0_0_05-W_0_5-IPC_A 29.454,39.303 r225 bottom
C38 "100n" FP-0402-L_1_0_0_05-W_0_5-IPC_A 42.197,26.59 r225 bottom
C39 "220n" FP-0402-L_1_0_0_05-W_0_5-IPC_A 41.136,50.278 r135 bottom
C40 "220n" FP-0402-L_1_0_0_05-W_0_5-IPC_A 39.722,48.864 r135 bottom
C41 "100n" FP-0402-L_1_0_0_05-W_0_5-IPC_A 40.782,28.004 r225 bottom
C42 "30p" FP-0402-L_1_0_0_05-W_0_5-IPC_A 46.086,50.985 r0 bottom
C43 "30p" FP-0402-L_1_0_0_05-W_0_5-IPC_A 48.586,50.985 r180 bottom
C44 "100n" FP-0402-L_1_0_0_05-W_0_5-IPC_A 30,49.3 r180 top
C45 "GRM188R60J106ME47D" FP-GRM188-0_1-e0_2_0_55-IPC_A 30,46 r270 top
C46 "10u" FP-0402-L_1_0_0_05-W_0_5-IPC_A 41.601,50.036 r225 top
C47 "100n" FP-0402-L_1_0_0_05-W_0_5-IPC_A 43.03,48.637 r225 top
C48 "10u" FP-0402-L_1_0_0_05-W_0_5-IPC_A 53.015,50.42 r315 top
C49 "100n" FP-0402-L_1_0_0_05-W_0_5-IPC_A 51.601,49.005 r315 top
C50 "10u" FP-0402-L_1_0_0_05-W_0_5-IPC_A 35.974,44.409 r45 top
C51 "100n" FP-0402-L_1_0_0_05-W_0_5-IPC_A 37.388,42.995 r45 top
C52 "10u" FP-0402-L_1_0_0_05-W_0_5-IPC_A 37.67,46.106 r225 top
C53 "100n" FP-0402-L_1_0_0_05-W_0_5-IPC_A 39.085,44.692 r225 top
C54 "10u" FP-0402-L_1_0_0_05-W_0_5-IPC_A 39.934,48.369 r45 top
C55 "10n" FP-0402-L_1_0_0_05-W_0_5-IPC_A 41.349,46.955 r45 top
C56 "10u" FP-0402-L_1_0_0_05-W_0_5-IPC_A 54.712,48.723 r135 top
C57 "10n" FP-0402-L_1_0_0_05-W_0_5-IPC_A 53.298,47.308 r135 top
C58 "100n" FP-0402-L_1_0_0_05-W_0_5-IPC_A 30,41.3 r180 top
C59 "GRM188R60J106ME47D" FP-GRM188-0_1-e0_2_0_55-IPC_A 30,38 r270 top
C60 "10u" FP-0402-L_1_0_0_05-W_0_5-IPC_A 56.41,47.025 r315 top
C61 "10n" FP-0402-L_1_0_0_05-W_0_5-IPC_A 54.995,45.611 r315 top
C62 "10u" FP-0402-L_1_0_0_05-W_0_5-IPC_A 56.709,38.273 r45 top
C63 "10n" FP-0402-L_1_0_0_05-W_0_5-IPC_A 55.293,39.687 r45 top
C64 "GRM21BR61E226ME44L" FP-GRM21B-0_2-e0_2_0_7-IPC_B 56.5,62.4 r270 bottom
C65 "GRM21BR61E226ME44L" FP-GRM21B-0_2-e0_2_0_7-IPC_B 51.2,57.25 r270 bottom
C66 "GRM21BR61E226ME44L" FP-GRM21B-0_2-e0_2_0_7-IPC_B 38.478,62.4 r270 bottom
C67 "GRM21BR61E226ME44L" FP-GRM21B-0_2-e0_2_0_7-IPC_B 43.8,57.25 r270 bottom
C68 "100n" FP-0402-L_1_0_0_05-W_0_5-IPC_A 54.238,28.004 r135 bottom
C69 "100n" FP-0402-L_1_0_0_05-W_0_5-IPC_A 52.824,26.59 r135 bottom
C70 "100n" FP-0402-L_1_0_0_05-W_0_5-IPC_A 33.696,35.06 r45 bottom
C71 "100n" FP-0402-L_1_0_0_05-W_0_5-IPC_A 32.282,36.474 r45 bottom
C72 "GRM21BR61E226ME44L" FP-GRM21B-0_2-e0_2_0_7-IPC_B 75.5,65.75 r0 top
D1 "ESD204DQAR" FP-DQA0010A-MFG 56.8,71.1 r315 bottom value=0.55pF
D2 "ESD204DQAR" FP-DQA0010A-MFG 50.5,67.6 r90 bottom value=0.55pF
D3 "ESD204DQAR" FP-DQA0010A-MFG 44.5,67.6 r90 bottom value=0.55pF
D4 "ESD204DQAR" FP-DQA0010A-MFG 38.2,71.1 r225 bottom value=0.55pF
F1 "0466002.NR" FP-0466-MFG 82,86 r0 top value=0.03Ω
F2 "2920L050DR" FP-2920L050DR-MFG 73,70 r180 top
F3 "2920L050DR" FP-2920L050DR-MFG 73,59 r180 top
F4 "2920L050DR" FP-2920L050DR-MFG 22,70 r0 top
F5 "2920L050DR" FP-2920L050DR-MFG 22,59 r0 top
J1 "1-1734248-5" FP-1-1734248-5-MFG 81.25,31.25 r45 top
J2 "1-1734248-5" FP-1-1734248-5-MFG 63.712,13.687 r45 top
J3 "1-1734248-5" FP-1-1734248-5-MFG 31.187,13.788 r315 top
J4 "1-1734248-5" FP-1-1734248-5-MFG 13.788,31.187 r315 top
J5 "1-2834011-2" 1-2834011-2-Footprint-1 83.8,73.5 r90 top
J6 "1-2834011-2" 1-2834011-2-Footprint-1 83.8,60.5 r90 top
J7 "1-2834011-2" 1-2834011-2-Footprint-1 83.8,47.5 r90 top
J8 "FM4-NZRP-PCB-1" FM4-NZRP-PCB-1-Footprint-1 47.5,75 r90 top
J9 "CES-109-01-G-S" FP-CES-109-01-G-S-MFG 5,68.16 r90 top
L1 "ADL32VHC-220M" FP-1210POC-MFG 54.5,66.145 r90 bottom value=22uH
L2 "PFL1609-561MEW" FP-PFL1609-MFG 57.4,68.2 r45 bottom value=0.56uH
L3 "ADL32VHC-220M" FP-1210POC-MFG 49.2,61 r90 bottom value=22uH
L4 "PFL1609-561MEW" FP-PFL1609-MFG 50.2,64.2 r45 bottom value=0.56uH
L5 "ADL32VHC-220M" FP-1210POC-MFG 40.5,66.145 r90 bottom value=22uH
L6 "PFL1609-561MEW" FP-PFL1609-MFG 37.6,68.2 r135 bottom value=0.56uH
L7 "ADL32VHC-220M" FP-1210POC-MFG 45.8,61 r90 bottom value=22uH
L8 "PFL1609-561MEW" FP-PFL1609-MFG 44.8,64.2 r135 bottom value=0.56uH
L9 "744066101" WE-TPC_1038 62,70 r270 top
L10 "744066101" WE-TPC_1038 62,59 r270 top
L11 "744066101" WE-TPC_1038 33,70 r90 top
L12 "744066101" WE-TPC_1038 33,59 r90 top
P1 "5-146280-2" TECO-5-146280-2_V 76,49 r90 top
P2 "5-146280-2" TECO-5-146280-2_V 76,42 r270 top
R5 "RC0402JR-070RL" RESC1005X40X25NL05T10 69.75,33 r135 top
R6 "RC0402JR-070RL" RESC1005X40X25NL05T10 52.1,15.3 r135 top
R7 "RC0402JR-070RL" RESC1005X40X25NL05T10 86,15.5 r0 top
R9 "RC0402JR-070RL" RESC1005X40X25NL05T10 5,15.5 r0 top
R11 "RC0402JR-070RL" RESC1005X40X25NL05T10 90,15.5 r180 top
R12 "RC0402JR-070RL" RESC1005X40X25NL05T10 9,15.5 r180 top
R13 "RC0402JR-070RL" RESC1005X40X25NL05T10 86,10.5 r0 top
R15 "RC0402JR-070RL" RESC1005X40X25NL05T10 5,10.5 r0 top
R17 "RC0402JR-070RL" RESC1005X40X25NL05T10 90,10.5 r180 top
R18 "RC0402JR-070RL" RESC1005X40X25NL05T10 9,10.5 r180 top
R23 "RC0402JR-070RL" RESC1005X40X25NL05T10 35.575,21 r0 top
R24 "RC0402JR-070RL" RESC1005X40X25NL05T10 17.6,35.7 r270 top
R25 "ERJ3EKF2201V" RESC1608X55X30LL15T15 56.339,44.268 r45 bottom
R26 "ERJ3EKF2201V" RESC1608X55X30LL15T15 57.541,43.066 r45 bottom
R27 "ERJ-3EKF4020V" RESC1608X55X30LL15T15 48.684,49.006 r45 top
R28 "ERJ3EKF1002V" RESC1609X55X30LL15T15 60,46.975 r90 bottom
R29 "ERJ-3EKF49R9V" RESC1608X55X30ML15T15 57.187,51.48 r225 bottom
R30 "ERJ-3EKF49R9V" RESC1608X55X30ML15T15 55.773,52.894 r225 bottom
R31 "ERJ-3EKF8062V" RESC1608X55X30LL15T15 65,47 r90 top
R32 "ERJ-3EKF8062V" RESC1608X55X30LL15T15 60,47 r90 top
R34 "ERJ-3EKF2052V" RESC1608X55X30NL15T15 65,44.5 r90 top
R35 "ERJ-3EKF2052V" RESC1608X55X30NL15T15 60,44.5 r90 top
R36 "ERJ-3EKF49R9V" RESC1608X55X30ML15T15 38.856,52.559 r315 bottom
R37 "ERJ-3EKF49R9V" RESC1608X55X30ML15T15 37.441,51.144 r315 bottom
R38 "RC0402JR-070RL" RESC1005X40X25NL05T10 34.913,46.177 r315 top
R39 "RC0402JR-070RL" RESC1005X40X25NL05T10 35.903,47.167 r315 top
R40 "RC0402JR-070RL" RESC1005X40X25NL05T10 38.873,50.137 r315 top
R41 "RC0402JR-070RL" RESC1005X40X25NL05T10 55.702,50.42 r225 top
R42 "RC0402JR-070RL" RESC1005X40X25NL05T10 58.107,48.015 r225 top
R43 "RC0402JR-070RL" RESC1005X40X25NL05T10 57.5,36 r90 top
R44 "ERJ-3EKF5101V" FP-ERJ3EK-MFG 56.778,65.6 r90 bottom
R45 "ERJ-3EKF5101V" FP-ERJ3EK-MFG 51.5,60.455 r90 bottom
R46 "ERJ-3EKF5101V" FP-ERJ3EK-MFG 38.2,65.6 r90 bottom
R47 "ERJ-3EKF5101V" FP-ERJ3EK-MFG 43.5,60.455 r90 bottom
TP1 "TPAD6R" "New footprint 1" 79,18 r90 top
TP2 "TPAD6R" "New footprint 1" 79,12 r90 top
TP3 "TPAD6R" "New footprint 1" 79,16.5 r90 top
TP4 "TPAD6R" "New footprint 1" 79,10.5 r90 top
TP5 "TPAD6R" "New footprint 1" 79,15 r90 top
TP6 "TPAD6R" "New footprint 1" 79,9 r90 top
TP7 "TPAD6R" "New footprint 1" 79,13.5 r90 top
TP8 "TPAD6R" "New footprint 1" 79,7.5 r90 top
TP10 "TPAD6R" "New footprint 1" 16,7.5 r90 top
TP11 "TPAD6R" "New footprint 1" 16,13.5 r90 top
TP12 "TPAD6R" "New footprint 1" 16,9 r90 top
TP13 "TPAD6R" "New footprint 1" 16,15 r90 top
TP14 "TPAD6R" "New footprint 1" 16,10.5 r90 top
TP15 "TPAD6R" "New footprint 1" 16,16.5 r90 top
TP16 "TPAD6R" "New footprint 1" 16,12 r90 top
TP17 "TPAD6R" "New footprint 1" 16,18 r90 top
TP22 "TPAD6R" "New footprint 1" 60.5,36 r90 top
TP23 "TPAD6R" "New footprint 1" 44,52.5 r90 top
TP24 "TPAD6R" "New footprint 1" 60.5,34.5 r90 top
TP25 "TPAD6R" "New footprint 1" 44,54 r90 top
TP26 "TPAD6R" "New footprint 1" 44,35.5 r90 top
TP27 "TPAD6R" "New footprint 1" 44,55.5 r90 top
TP28 "TPAD6R" "New footprint 1" 44,37 r90 top
TP29 "TPAD6R" "New footprint 1" 60.5,40.5 r90 top
TP30 "TPAD6R" "New footprint 1" 44,38.5 r90 top
TP31 "TPAD6R" "New footprint 1" 60.5,39 r90 top
TP32 "TPAD6R" "New footprint 1" 44,51 r90 top
TP33 "TPAD6R" "New footprint 1" 60.5,37.5 r90 top
TP34 "TPAD6R" "New footprint 1" 60.5,42 r90 top
U1 "MAX96724FGTN/V+" MAX96724FGTN_V+-Footprint-1 47.5,42.5 r315 bottom
U2 "LD1117S18TR" SOT-223_M 23,47 r180 top
U3 "LD1117S12TR" SOT-223_M 23,39 r180 top
Y1 "ABM8G-25.000MHZ-18-D2Y-T" FP-ABM8G-MFG 47.5,55.228 r90 bottom

## Footprints (in the part's own frame and the unit in brackets; to place one, negate y for a bottom-side part, rotate by r counter-clockwise, add the part's x,y. Pads: shape width x height; smd on the part's side, far side on the other; paste and mask are expansions set on the pad)
1-2834011-2-Footprint-1 [mil]
  round 62 / inner round 60 / far side round 62 hole 42 paste-99999 mask+0: 1(0,0) 2(137.8,-204.72)
  silkscreen extent -243,-402 206,92, body extent -132,-386 202,86, height 499
FM4-NZRP-PCB-1-Footprint-1 [mm]
  round 1.2 hole 0.7: 1(-1.91,-2) 2(2.09,-2) 3(2.09,2) 4(-1.91,2)
  round 2.1 hole 1.4: MH1(0,0)
  round 2.55 hole 1.7: MH2(-3.5,-4.575) MH3(4.6,-4.575) MH4(4.6,4.575) MH5(-3.5,4.575)
  TOP region: -4.8,-0.65 5.9,-0.65 5.9,0.65 -4.8,0.65
  TOP region: 0.6,-5.8 0.6,5.8 -0.6,5.8 -0.6,-5.8
  TOP region: -3.5,3.3 4.6,3.3 4.6,5.85 -3.5,5.85
  TOP region: -3.475,-5.85 4.625,-5.85 4.625,-3.3 -3.475,-3.3
  TOP region: 3.85,-2.2 5.95,-2.2 5.95,2.2 3.85,2.2
  silkscreen extent -5.9,-6.5 17.25,6.5, body extent -4.76,-5.99 17.8,5.99, height 15.79
FP-1-1734248-5-MFG [mm]
  rect 0.6x1.65 smd paste+0 mask+0: 1(7,-1.75) 2(6,-1.75) 3(5,-1.75) 4(4,-1.75) 5(3,-1.75) 6(2,-1.75) 7(1,-1.75) 8(0,-1.75) 9(-1,-1.75) 10(-2,-1.75) 11(-3,-1.75) 12(-4,-1.75) 13(-5,-1.75) 14(-6,-1.75) 15(-7,-1.75)
  rect 0.6x1.85 smd paste+0 mask+0: 1(7,2) 2(6,2) 3(5,2) 4(4,2) 5(3,2) 6(2,2) 7(1,2) 8(0,2) 9(-1,2) 10(-2,2) 11(-3,2) 12(-4,2) 13(-5,2) 14(-6,2) 15(-7,2)
  silkscreen extent -11.55,-2.07 11.55,3.6, body extent -11.65,-2.67 11.65,3.02, height 0.25
FP-0402-L_1_0_0_05-W_0_5-IPC_A [mm]
  rect 0.715x0.672 smd paste+0 mask+0: 1(-0.479,0) 2(0.479,0)
  silkscreen extent -0.84,-0.74 0.84,0.74, body extent -1.04,-0.54 1.04,0.54, height 0.25
FP-0466-MFG [mil]
  rect 45x80 smd paste+0 mask+0: 1(-52.5,0) 2(52.5,0)
  silkscreen extent -15,-32 15,32, body extent -79,-44 79,44, height 10
FP-1210POC-MFG [mm]
  rect 0.65x2.65 smd paste+0 mask+0: 1(-1.27,0) 2(1.27,0)
  silkscreen extent -0.57,-1.34 0.57,1.34, body extent -1.65,-1.34 1.65,1.34, height 3
FP-2920L050DR-MFG [mm]
  rect 2x5.3 smd paste+0 mask+0: 1(-3.3,0) 2(3.3,0)
  silkscreen extent -1.92,-2.72 1.92,2.72, body extent -3.68,-2.56 3.68,2.56, height 2
FP-ABM8G-MFG [mm]
  rect 1.4x1.2 smd paste+0 mask+0: 1(-1.1,-0.85) 2(1.1,-0.85) 3(1.1,0.85) 4(-1.1,0.85)
  silkscreen extent -2.47,-1.83 1.6,1.83, body extent -1.6,-1.25 1.6,1.25, height 1
FP-CES-109-01-G-S-MFG [mm]
  rect 1.31x1.31 hole 0.81 paste-2539.97 mask+0: 1(-10.16,0)
  round 1.31 hole 0.81 paste-2539.97 mask+0: 2(-7.62,0) 3(-5.08,0) 4(-2.54,0) 5(0,0) 6(2.54,0) 7(5.08,0) 8(7.62,0) 9(10.16,0)
  silkscreen extent -12.27,-1.59 11.55,1.59, body extent -11.65,-1.69 11.65,1.69, height 0.25
FP-DQA0010A-MFG [mm]
  rrect50% 0.565x0.2 smd paste+0 mask+0: 1(-0.417,1) 2(-0.417,0.5) 4(-0.417,-0.5) 5(-0.417,-1) 6(0.417,-1) 7(0.417,-0.5) 9(0.417,0.5) 10(0.417,1)
  rrect25% 0.565x0.4 smd paste-1000 mask+0: 3(-0.417,0) 8(0.417,0)
  silkscreen extent -1.37,-1.48 0.55,1.48, body extent -0.5,-1.25 0.5,1.25, height 0.55
FP-ERJ3EK-MFG [mm]
  rect 0.65x0.9 smd paste+0 mask+0: 1(-0.725,0) 2(0.725,0)
  silkscreen extent 0,-0.48 0,0.48, body extent -0.8,-0.4 0.8,0.4, height 0.55
FP-GRM21B-0_2-e0_2_0_7-IPC_B [mm]
  rect 1.255x1.456 smd paste+0 mask+0: 1(-0.826,0) 2(0.826,0)
  silkscreen extent -1.45,-1.13 1.45,1.13, body extent -1.7,-0.98 1.7,0.98, height 0.25
FP-GRM188-0_1-e0_2_0_55-IPC_A [mm]
  rect 1.208x1.012 smd paste+0 mask+0: 1(-0.802,0) 2(0.802,0)
  silkscreen extent -1.41,-0.91 1.41,0.91, body extent -1.91,-1.01 1.91,1.01, height 0.25
FP-PFL1609-MFG [mm]
  rect 0.64x1.02 smd paste+0 mask+0: 1(-0.635,0) 2(0.635,0)
  silkscreen extent -0.9,-0.89 0.9,0.89, body extent -0.9,-0.54 0.9,0.54, height 0.95
MAX96724FGTN_V+-Footprint-1 [mm]
  oval 0.95x0.25 smd: 1(-3.875,3.25) 2(-3.875,2.75) 3(-3.875,2.25) 4(-3.875,1.75) 5(-3.875,1.25) 6(-3.875,0.75) 7(-3.875,0.25) 8(-3.875,-0.25) 9(-3.875,-0.75) 10(-3.875,-1.25) 11(-3.875,-1.75) 12(-3.875,-2.25) 13(-3.875,-2.75) 14(-3.875,-3.25) 29(3.875,-3.25) 30(3.875,-2.75) 31(3.875,-2.25) 32(3.875,-1.75) 33(3.875,-1.25) 34(3.875,-0.75) 35(3.875,-0.25) 36(3.875,0.25) 37(3.875,0.75) 38(3.875,1.25) 39(3.875,1.75) 40(3.875,2.25) 41(3.875,2.75) 42(3.875,3.25)
  oval 0.25x0.95 smd: 15(-3.25,-3.875) 16(-2.75,-3.875) 17(-2.25,-3.875) 18(-1.75,-3.875) 19(-1.25,-3.875) 20(-0.75,-3.875) 21(-0.25,-3.875) 22(0.25,-3.875) 23(0.75,-3.875) 24(1.25,-3.875) 25(1.75,-3.875) 26(2.25,-3.875) 27(2.75,-3.875) 28(3.25,-3.875) 43(3.25,3.875) 44(2.75,3.875) 45(2.25,3.875) 46(1.75,3.875) 47(1.25,3.875) 48(0.75,3.875) 49(0.25,3.875) 50(-0.25,3.875) 51(-0.75,3.875) 52(-1.25,3.875) 53(-1.75,3.875) 54(-2.25,3.875) 55(-2.75,3.875) 56(-3.25,3.875)
  rect 4.7x4.7 smd: 57(0,0)
  silkscreen extent -4.97,-4.2 4.2,4.2, body extent -4.05,-4.05 4.05,4.05, height 0.8
"New footprint 1" [mm]
  round 0.6 smd paste-1: 1(0,0)
PNSC-FK-V-D8_V [mm] "CAPAE, 2-Leads, Body 6.80x6.80mm"
  rect 3.2x1.6 smd: 1(-2.5,0) 2(2.5,0)
  silkscreen extent -4.6,-3.4 3.4,3.4, body extent -3.9,-3.4 3.9,3.4, height 8
RESC1005X40X25NL05T10 [mm] "Chip Resistor, 2-Leads, Body 1.00x0.50mm, IPC Medium Density"
  rect 0.6x0.55 smd: 1(-0.425,0) 2(0.425,0)
  body extent -0.53,-0.27 0.53,0.28, height 0.4
RESC1608X55X30LL15T15 [mm] "Chip Resistor, 2-Leads, Body 1.60x0.80mm, IPC High Density"
  rect 0.7x0.85 smd: 1(-0.625,0) 2(0.625,0)
  body extent -0.87,-0.48 0.87,0.48, height 0.55
RESC1608X55X30ML15T15 [mm] "Chip Resistor, 2-Leads, Body 1.60x0.80mm, IPC Low Density"
  rect 0.9x1.05 smd: 1(-0.725,0) 2(0.725,0)
  body extent -0.88,-0.47 0.88,0.48, height 0.55
RESC1608X55X30NL15T15 [mm] "Chip Resistor, 2-Leads, Body 1.60x0.80mm, IPC Medium Density"
  rect 0.8x0.95 smd: 1(-0.675,0) 2(0.675,0)
  body extent -0.87,-0.48 0.87,0.48, height 0.55
RESC1609X55X30LL15T15 [mm] "Chip Resistor, 2-Leads, Body 1.75x0.95mm, IPC High Density"
  rect 0.75x0.85 smd: 1(-0.65,0) 2(0.65,0)
  body extent -0.87,-0.48 0.87,0.48, height 0.55
SOT-223_M [mm] "SOT223, 4-Leads, Body 6.5x3.5mm, Pitch 2.3mm, Lead Span 7mm, IPC Low Density"
  rect 2.7x1 smd: 1(-2.95,2.3) 2(-2.95,0) 3(-2.95,-2.3)
  rect 2.7x3.3 smd: 4(2.95,0)
  silkscreen extent -3.08,-3.35 1.3,3.47, body extent -1.85,-3.35 1.85,3.35, height 1.8
TECO-5-146280-2_V [mm] "Connector, 2-Leads, Body 4.67x2.34mm, Pitch 2.54mm"
  rect 1.4x1.4 hole 0.89: 1(-1.27,0)
  round 1.4 hole 0.89: 2(1.27,0)
  silkscreen extent -2.33,-1.17 2.33,1.94, body extent -2.34,-1.17 2.34,1.17, height 5.33
WE-TPC_1038 [mm] "Power Inductor, SMD, 2-Leads, body 10x10mm"
  rect 4.6x1.8 smd: 1(0,4.5) 2(0,-4.5)
  silkscreen extent -5,-4.5 5,6.03, body extent -5,-5 5,5, height 3.8

## Part data
C1 C2: library part CMP-2000-06206-1, "Aluminum Electrolytic Capacitor, 100 uF, +/- 20%, 25 V, 2-Pin SMD (Size Code D8), -55 to 105 degC, RoHS, Tape and Reel", Capacitance=100µF, Case Size/Dimension=Ø6.3x7.7mm, Lifetime@Temperature=2000Hrs@105°C, Manufacturer=Panasonic, Operating Temp Range=-55to+105°C, Operating Temp-Max=105°C, Package Description="2-Pin Electrolytic Aluminum Capacitor, Body 6.6 x 6.6 mm", Package Reference=FK-V-D8, Rated Voltage=25V, Ripple Current=280mA, Datasheet URL=http://industrial.panasonic.com/cdbs/www-data/pdf/RDE0000/ABA0000C1181.pdf, Datasheet Version=03/2016, Impedance=0.34O, Manufacturer URL=http://www.panasonic.com/, Mounting Technology=SurfaceMount, Package URL=http://industrial.panasonic.com/cdbs/www-data/pdf/RDE0000/DME0000COL48.pdf, Series=FK, Type=Can
C3 C4 C5 C64 C65 C66 C67 C72: library part CMP-2007-03222-3, "Chip Multilayer Ceramic Capacitors for General Purpose, 0805, 22uF, X5R, 15%, 20%, 25V", Capacitance=22uF, Case Code (Imperial)=0805, Case Code (Metric)=2012, Dielectric=X5R, Max Operating Temperature=85°C, Min Operating Temperature=-55°C, Package Quantity=3000, Resistor Type=Ceramic, Tolerance=20%, Voltage=25V, Case/Package=0805, Depth=1.25mm, Height=1.25mm, Lead Free="Lead Free", Length=2mm, Material=Ceramic, Mount="Surface Mount", Packaging="Tape and Reel", REACH SVHC="No SVHC", Termination=SMD/SMT, Thickness=0.057inch, Voltage Rating=25V, Voltage Rating (DC)=25V, Weight=0.000335oz, Width=1.25mm
C6 C7 C8 C9 C10 C11 C12 C13 C14 C15 C16 C17 C18 C19 C20 C21 C22 C23 C24 C25 C26 C27 C28 C29 C30 C31 C32 C33 C34 C35 C36 C37 C38 C39 C40 C41 C42 C43 C44 C46 C47 C48 C49 C50 C51 C52 C53 C54 C55 C56 C57 C58 C60 C61 C62 C63 C68 C69 C70 C71: library part CMP-001-00058-1, "LARGE PADS, 0402 CAP, CHANGE COMMENT TO MATCH REAL P/N", Capacitor Type=Ceramic, Case/Package=0402, Max Operating Temperature=85°C, Min Operating Temperature=-55°C, Mounting Technology="Surface Mount", Pins=2, RoHS Compliant=Yes
C45 C59: library part CMP-2006-02792-2, "Chip Multilayer Ceramic Capacitors for General Purpose, 0603, 10uF, X5R, 15%, 20%, 6.3V", Capacitance=10uF, Case Code (Imperial)=0603, Case Code (Metric)=1608, Dielectric=X5R, Max Operating Temperature=85°C, Min Operating Temperature=-55°C, Package Quantity=4000, Tolerance=20%, Voltage=6.3V, Case/Package=0603, Depth=0.8mm, Height=0.8mm, Lead Free="Lead Free", Length=1.6mm, Material=Ceramic, Mount="Surface Mount", Packaging="Tape and Reel", Radiation Hardening=No, REACH SVHC="No SVHC", Termination=SMD/SMT, Thickness=0.035inch, Voltage Rating=6.3V, Voltage Rating (DC)=6.3V, Width=0.031inch
D1 D2 D3 D4: library part CMP-04989-000002-1, "4-CHANNEL LOW-CAPACITANCE SURGE", Ambient Temperature Range High=+125°C, Ambient Temperature Range Low=-40°C, Breakdown Voltage=5.5V, Capacitance=0.55pF, Clamping Voltage=11.5V, Manufacturer="Texas Instruments", Package=DQA0010A, Peak Pulse Current=5.5A, Peak Pulse Power=50W, Reverse Standoff Voltage=3.6V, Temperature="-40°C to +125°C", Automotive=No, Category=Diode, ComponentLink2Description=Datasheet, ComponentLink2URL=http://www.ti.com/lit/ds/symlink/esd204.pdf, Device Class L1="Circuit Protection", Device Class L2="TVS Diodes", Device Class L3=unset, Digikey Description="4-CHANNEL LOW-CAPACITANCE SURGE", Direction=Bidirectional, Height=0.55mm, Lead Free=Yes, Manufacturer Part Number=ESD204DQAR, Mouser Description="4-Channel Low-Capacitance Surge and ESD Protection Diode 10-USON -40 to 125", Number of Channels=4, Octopart=https://octopart.com/esd204dqar-texas+instruments-89917476, RoHS=TRUE, Standoff Height=0mm, Temperature Range High=+125°C, Temperature Range Low=-40°C
F1: library part CMP-2000-05742-2, "FUSE BOARD MNT 2A 63VAC/VDC 1206", Fuse Current=2A, Fuse Interrupt Ac Current=50A, Fuse Voltage Drop=78.73mV, Manufacturer=Littelfuse, Max Fuse Ac Voltage=63V, Package=0466, Resistance=0.03Ω, Temperature="-55°C to +90°C", Temperature Range High=+90°C, Temperature Range Low=-55°C, Automotive=No, Category=Fuse, ComponentLink2Description=Datasheet, ComponentLink2URL=https://www.littelfuse.com/~/media/electronics/datasheets/fuses/littelfuse_fuse_466_datasheet.pdf.pdf, Device Class L1="Circuit Protection", Device Class L2=Fuses, Device Class L3=unset, Digikey Description="FUSE BOARD MNT 2A 63VAC/VDC 1206", Fuse Blow Speed=Fast, Fuse I2T=0.2326A2Sec, Fuse Interrupt Dc Current=50A, Height=0.66mm, Lead Free=Yes, Manufacturer Part Number=0466002.NR, Max Fuse Dc Voltage=63V, Mouser Description="466 Series Very Fast-Acting 63 V 2 A 1206 Surface Mount Thin Film Fuse", Octopart=https://octopart.com/0466002.nr-littelfuse-566006, RoHS=TRUE, Voltage Rating=63V
F2 F3 F4 F5: library part CMP-08606-000071-1, "PTC RESET FUSE 60V 500MA 2920", Case Code (Imperial)=2920, Case Code (Metric)=7351, Current Rating=10A, Hold Current=500mA, Max Operating Temperature=85°C, Max Voltage Rating (DC)=60V, Min Operating Temperature=-40°C, Package Quantity=1500, Power Dissipation=1.5W, Resistance=1.4R, Trip Current=1A, Approvals=cULus, Case/Package=2920, Height=1.25mm, Lead Free="Lead Free", Length=7.98mm, Max Current Rating=10A, Operating Supply Voltage=60V, Packaging="Tape and Reel", REACH SVHC="No SVHC", RoHS Compliant=Yes, Series=2920L, Terminal Material=Copper, Termination=SMD/SMT, Time to Trip=4s, Voltage Rating=60V, Voltage Rating (DC)=60V, Width=5.44mm, Working Voltage=60V
J1 J2 J3 J4: library part CMP-03368-000001-1, "CONN FPC VERT 15POS 1.00MM SMD", Current Rating=1A, Manufacturer=TE, Package=0, Temperature="-20°C to +85°C", Temperature Range High=+85°C, Temperature Range Low=-20°C, Voltage Rating=125V, Automotive=No, Category=Conn, ComponentLink2Description=Datasheet, ComponentLink2URL=https://www.te.com/commerce/DocumentDelivery/DDEController?Action=showdoc&DocId=Customer+Drawing%7F1734248%7FE1%7Fpdf%7FEnglish%7FENG_CD_1734248_E1__.pdf%7F1-1734248-5, Conn Gender=Female, Conn Orientation=Vertical, Contact Material=Gold,Nickel, Device Class L1=Connectors, Device Class L2="FFC / FPC", Device Class L3=unset, Digikey Description="CONN FPC VERT 15POS 1.00MM SMD", Height=8mm, Is Female=yes, Lead Free=Yes, Manufacturer Part Number=1-1734248-5, Mounting Type="Surface Mount", Mouser Description="FFC & FPC Connectors 15P 1.0 FPC, Zip V/T SMT", Number of Contacts=15, Octopart=https://octopart.com/1-1734248-5-te+connectivity-40620898, Pitch=1mm, RoHS=TRUE
J5 J6 J7: library part CMP-002-00067-1, "Barrier Strip Terminal Block", RoHS Compliant=Yes
J8: library part CMP-002-00044-3, "Connector RF Mini-FAKRA Plug 9GHz 50Ohm Solder Right Angle Through Hole", Component Type=Standard, Design Item ID=CMP-002-00085-1, Pins=9, Source=fakra4ch.SchLib
J9: library part CMP-00575-09340057-1, "CES-109-01-G-S Conn Socket Strip SKT 9 POS 2.54mm Solder ST Top Entry Thru-Hole Tube", Contact Resistance=10mΩ, Current Rating=5.5A, Housing Color=Black, Manufacturer Lifecycle Status=PRODUCTION, Max Current Rating=1A, Max Operating Temperature=125°C, Max Voltage Rating (AC)=333V, Min Operating Temperature=-55°C, Voltage Rating=400V, Contact Material="Bronze, Gold, Nickel", Contact Plating=Gold, Depth=3.05mm, Gender=Receptacle, Height=5.21mm, Housing Material=Polyester, Length=22.86mm, Lifecycle Status=Production, NexarPartId=9340057, Number of Contacts=9, Number of Rows=1, Orientation=Straight, Pitch=2.54mm, Radiation Hardening=No, REACH SVHC="No SVHC", RoHS=Compliant, Termination=Solder
L1 L3 L5 L7: library part CMP-11268-000041-1, "NOT COILCRAFT - ACTUAL P# --> ADL32VHC-220M /  - Power Injection Chokes for PoC", Ambient Temperature Range High=+125°C, Ambient Temperature Range Low=-40°C, Inductance=22uH, Manufacturer=coilcraft, Manufacturer Part Number=1210POC-223MRC, Package=1210POC, Rms Current=700mA, Saturation Current=720mA, Self Resonant Frequency=70MHz, Series Resistance=0.88Ω, Test Frequency=100kHz, Tolerance=20%, Automotive=Yes, Automotive Grade="Grade 1", Category=Ind, ComponentLink2Description=Datasheet, ComponentLink2URL=https://drive.google.com/open?id=15FlOq8Y4YbRFohfA_cJ40jgnqs8va2Mh, Core Material=Ferrite, Device Class L1="Passive Components", Device Class L2=Inductors, Device Class L3="Fixed Inductors", Height=3mm, Lead Free=Yes, Octopart=https://octopart.com/1210poc-223mrc-coilcraft-103207315, RoHS=TRUE
L2 L4 L6 L8: library part CMP-11268-000007-1, "Fixed Inductors PFL1609 Low Profile 0.56 uH 20 % 1.4 A", Ambient Temperature Range High=+105°C, Ambient Temperature Range Low=-40°C, Inductance=0.56uH, Manufacturer=coilcraft, Package=PFL1609, Rms Current=1100mA, Saturation Current=710mA, Self Resonant Frequency=600MHz, Series Resistance=130mΩ, Test Frequency=7.9MHz, Tolerance=20%, Automotive=Yes, Automotive Grade="Grade 1", Category=Ind, ComponentLink2Description=Datasheet, ComponentLink2URL=https://www.coilcraft.com/pdfs/pfl1609.pdf, Composition=Wirewound, Core Material=Composite, Device Class L1="Passive Components", Device Class L2=Inductors, Device Class L3="Fixed Inductors", Height=0.95mm, Lead Free=Yes, Manufacturer Part Number=PFL1609-561MEW, Mouser Description="Fixed Inductors PFL1609 Low Profile 0.56 uH 20 % 1.4 A", Octopart=https://octopart.com/pfl1609-561mew-coilcraft-20329171, RoHS=TRUE, Shielding=true
L9 L10 L11 L12: library part CMP-0227-00094-3, Ambient Temperature Range High=95°C, Ambient Temperature Range Low=-40°C, Case/Package=Nonstandard, Current Rating=1.2A, DC Resistance (DCR)=255mΩ, Inductance=100µH, Inductance Tolerance=30%, Max Operating Temperature=125°C, Self Resonant Frequency=6MHz, Test Frequency=100kHz, Composition=Wirewound, Core Material=Ferrite, Depth=10mm, Height=3.8mm, Height - Seated (Max)=4.0894mm, Length=10mm, Max DC Current=1.2A, Min Operating Temperature=-40°C, Mount="Surface Mount", NexarPartId=8917123, Number of Pins=2, Packaging="Cut Tape (CT)", REACH SVHC=Unknown, Resistance=255mΩ, RMS Current (Irms)=1.2A, RoHS=Compliant, Saturation Current=1.2A, Shielding=Shielded, Termination=SMD/SMT, Tolerance=30%, Weight=1.273007g, Width=10mm
P1 P2: library part CMP-2000-07492-1, "Male Header, Pitch 2.54 mm, 1 x 2 Position, Height 8.21 mm, Tail Length 3.05 mm, -65 to 105 degC, RoHS, Bulk", Case\/Package=100, Colour=Black, Current Rating=3A, Flammability Rating=UL94V-0, High Temperature Housing=Yes, Manufacturer="TE Connectivity", Max Current Rating=5A, Max Operating Temperature=105degC, Min Operating Temperature=-65degC, Package Description="Male Header, Pitch 2.54 mm, 1 x 2 Position, Height 8.21 mm, Tail Length 3.05 mm", Package Quantity=500, Approvals=CSA, Board Standoff=No(Without), Connector Type=Header, Contact Gender=Male, Contact Material=CopperAlloy, Contact Mating Length=0.23inch, Contact Plating=Matte, Contact Protection=No(Without), Contact Shape=Square, Datasheet URL=http://www.te.com/commerce/DocumentDelivery/DDEController?Action=showdoc&DocId=Customer+Drawing%7F146280%7FH1%7Fpdf%7FEnglish%7FENG_CD_146280_H1.pdf%7F5-146280-2, Datasheet Version="Rev. H1, 08/2016", Depth=2.34mm, Gasket=No(Without), High Speed Serial Data Connector=No, Housing Colour=Black, Housing Material=Polymer, Keyed=No, Length=4.67mm, Manufacturer URL=http://www.te.com/, Mating Alignment=No(Without), Mating Connector Lock=No(Without), Mating Post Length=0.23inch, Mount=ThroughHole, Mounting Technology=ThroughHole, Number of Contacts=2, Number of Positions=2, Number of Rows=1, Orientation=Straight, Package Reference=5-146280-2, Packaging=Carton, Panel Mount Retention=No(Without), PCB Mount Retention=Without, PCB Mounting Orientation=Vertical, PCB Thickness=0.063inch, Pitch=2.54mm, Radiation Hardening=No, RoHSCompliant=true, Row Spacing=2.54mm, Selectively Loaded=No(Without), Stabilizers=No(Without), Termination=ThroughHole, Termination Post Length=0.12inch
R5 R6 R7 R9 R11 R12 R13 R15 R17 R18 R23 R24 R38 R39 R40 R41 R42 R43: library part CMP-1011-00001-2, Manufacturer="Yageo / Phycomp", Part Number=RC0402JR-070RL
R25 R26: library part CMP-2000-00336-1, Manufacturer=Panasonic, Part Number=ERJ3EKF2201V
R27: library part CMP-2000-00484-1, Manufacturer=Panasonic, Part Number=ERJ-3EKF4020V
R28: library part CMP-1012-00623-3, "Chip Resistor, 10 KOhm, +/- 1%, 0.1 W, -55 to 155 degC, 0603 (1608 Metric), RoHS, Tape and Reel", Case Code (Imperial)=0603, Case Code (Metric)=1608, Manufacturer=Panasonic, Max Operating Temperature=155degC, Max Power Dissipation=100mW, Min Operating Temperature=-55degC, Package Description="2-Pin Surface Mount Device, Body 1.6 x 0.85 mm", Package Quantity=1, Package Reference=603, Resistance=10KOhm, Temperature Coefficient=100ppm\/degreesC, Tolerance=1%, Voltage Rating=75V, Case\/Package=0603, Composition=ThickFilm, Contact Plating=Tin, Datasheet URL=https://industrial.panasonic.com/cdbs/www-data/pdf/RDA0000/AOA0000C304.pdf, Datasheet Version=02/2017, Depth=0.8mm, Height=0.45mm, Lead Free=LeadFree, Length=1.6mm, Manufacturer URL=http://www.panasonic.com/, Military Standard=Not, Mount=SurfaceMount, Mounting Technology=SurfaceMount, Number of Pins=2, Number of Terminations=2, Packaging=TapeandReel, Power Rating=100mW, Radiation Hardening=No, REACH SVHC=NoSVHC, RoHSCompliant=true, Termination=SMD/SMT, Voltage Rating (DC)=75V, Width=0.031inch
R29 R30 R36 R37: library part CMP-2000-00538-1, Manufacturer=Panasonic, Part Number=ERJ-3EKF49R9V
R31 R32: library part CMP-2000-00651-1, Manufacturer=Panasonic, Part Number=ERJ-3EKF8062V
R34 R35: library part CMP-2000-00323-1, Manufacturer=Panasonic, Part Number=ERJ-3EKF2052V
R44 R45 R46 R47: library part CMP-2000-00540-8, "RES SMD 5.1K OHM 1% 1/10W 0603", Case Code (Imperial)=0603, Case Code (Metric)=1608, Max Operating Temperature=155°C, Max Power Dissipation=100mW, Min Operating Temperature=-55°C, Package Quantity=1, Resistance=5.1kR, Resistance Tolerance=1%, Resistor Type="Thick Film", Temperature Coefficient=100ppm/°C, Voltage Rating=75V, Case/Package=0603, Construction=Rectangular, Contact Plating=Tin, Depth=0.8mm, Features="Automotive AEC-Q200", Height=0.022inch, Lead Free="Lead Free", Length=1.6mm, Military Standard=Not, Mount="Surface Mount", Number of Terminations=2, Packaging="Tape and Reel", Power Rating=100mW, Radiation Hardening=No, Reach SVHC Compliant=Yes, RoHS Compliant=Yes, Series=ERJ, Size Code=0603, Termination=SMD/SMT, Tolerance=1%, Voltage Rating (DC)=75V, Weight=7.1E-05oz, Width=0.8mm
TP1 TP2 TP3 TP4 TP5 TP6 TP7 TP8 TP10 TP11 TP12 TP13 TP14 TP15 TP16 TP17 TP22 TP23 TP24 TP25 TP26 TP27 TP28 TP29 TP30 TP31 TP32 TP33 TP34: library part CMP-00025-2, "Test Point .6mm"
U1: library part CMP-015-00011-2, "Quad Tunneling GMSL2/1 to CSI-2 Deserializer"
U2: library part CMP-0244-00308-1, "Fixed Low Drop Positive Voltage Regulator, 1.8V, 4-Pin SOT-223, Tape and Reel", ComponentLink1Description="Manufacturer URL", ComponentLink1URL=http://www.st.com, ComponentLink2Description=Datasheet, ComponentLink2URL=http://www.st.com/internet/com/TECHNICAL_RESOURCES/TECHNICAL_LITERATURE/DATASHEET/CD00000544.pdf, DatasheetVersion=1/11/2011, PackageDescription="4-Pin SOT-223 Package, 6.5 x 3.5 mm Body, 2.3 mm Pitch, 7 mm Lead Span", PackageReference=SOT-223, PackageVersion=2010
U3: library part CMP-0244-00318-1, "Fixed Low Drop Positive Voltage Regulator, 1.2V, 4-Pin SOT-223, Tape and Reel", ComponentLink1Description="Manufacturer URL", ComponentLink1URL=http://www.st.com, ComponentLink2Description=Datasheet, ComponentLink2URL=http://www.st.com/internet/com/TECHNICAL_RESOURCES/TECHNICAL_LITERATURE/DATASHEET/CD00000544.pdf, DatasheetVersion=1/11/2011, PackageDescription="4-Pin SOT-223 Package, 6.5 x 3.5 mm Body, 2.3 mm Pitch, 7 mm Lead Span", PackageReference=SOT-223, PackageVersion=2010
Y1: library part CMP-2000-05733-3, "Crystal 25MHz ±20ppm (Tol) ±30ppm (Stability) 18pF FUND 60Ω 4-Pin SMD T/R", Case/Package=CSMD, ESR (Equivalent Series Resistance)=60R, Frequency=25MHz, Frequency Stability=30ppm, Frequency Tolerance=20ppm, Load Capacitance=18pF, Max Operating Temperature=85°C, Min Operating Temperature=-40°C, Operating Frequency="25 MHz", Package Quantity=1000, Depth=2.5mm, Height=0.039inch, Lead Free="Lead Free", Length=3.2mm, Mount="Surface Mount", Number of Pins=4, Packaging="Tape and Reel", Radiation Hardening=No, Series=ABM8G, Series Resistance=60R, Termination=SMD/SMT, Tolerance=20ppm, Width=0.098inch

## Via types
v1: diameter 0.5, hole 0.3, TOP to BOT, 75 vias
v2: diameter 0.5, hole 0.3, TOP to BOT, tented both sides, 22 vias
v3: diameter 0.5, hole 0.2, TOP to BOT, 16 vias
v4: diameter 1, hole 0.6, TOP to BOT, 4 vias
v5: diameter 5, hole 3.5, TOP to BOT, 4 vias

## Nets (pads, with @x,y where several pads share a name; then routed paths per layer and width w, separated by ;. In a path a pad name is that pad's centre, name@x,y a point inside that pad or via, vN(x,y) a via of type N, cw(c..) or ccw(c..) an arc to the next point about the centre after c; other vN are vias at no path point)
3V3_AUX: J7.1 P1.1 R5.2 R6.2 R23.2 R24.2 R25.2 R26.2 R28.2 R31.2 R32.2 R42.1 | length 137.9
  TOP w0.5: R24.2@17.6,35.275 17.6,35.25 17.625,35.225 17.65,35.225 22.425,30.45 58.25,30.45 ; R23.2@36,21 48.8,21 50.8,23 ; R6.2@51.799,15.601 50.8,16.6 50.8,23 ; 68.6,47.625 68.6,40.8 ; R5.2@69.449,33.301 68.6,34.15 68.6,40.8 ; 50.8,23 58.25,30.45 ; 58.25,30.45 68.6,40.8
  TOP w0.75: R42.1@58.407,48.316 59.098,47.625 R31.2@65,47.625 68.6,47.625 75.895,47.625 P1.1@76,47.73
  TOP w2: P1.1@76,47.73 83.57,47.73 J7.1@83.8,47.5
  BOT w0.3: R26.2@57.983,43.508 R25.2@56.781,44.71 56.791,44.699 57.074,44.699 v1(60,47.625)
CAM_1V2: C59.1 R38.1 R39.1 R43.1 U3.2 U3.4 | length 51.1
  TOP w0.5: C59.1@30,38.802 35.198,38.802 40,34 55.95,34 57.5,35.55 R43.1@57.5,35.575 ; C59.1@30,38.869 30,38.9 33,41.9 33,44.864 R38.1@34.613,46.477 ; R38.1@34.613,46.513 R39.1@35.585,47.485
  TOP w0.75: U3.4@20.05,39 U3.2@25.95,39 29.869,39 C59.1@30,38.869
CAM_1V8: C45.1 R40.1 R41.1 U2.2 U2.4 | length 45
  TOP w0.5: C45.1@30,46.802 30,46.9 C45.1@30.256,47.156 ; 36.437,50.437 42.369,56.369 50.354,56.369 R41.1@56.003,50.72
  TOP w0.75: U2.4@20.05,47 U2.2@25.95,47 29.869,47 30,46.869 C45.1@30,46.802 32.802,46.802 36.437,50.437 R40.1@38.573,50.437
CAM_I2C_SCL: P2.2 R13.2 R15.2 R17.2 R18.2 R26.1 TP24.1 U1.29 | length 182.6
  TOP w0.2: R15.2@5.425,10.5 v1(7,10.5) R18.2@8.575,10.5 ; v1(55.49,42.288) 55.518,42.26 56.04,42.26 58.7,39.6 58.7,36.3 TP24.1@60.5,34.5 ; R13.2@86.425,10.5 v1(88,10.5) R17.2@89.575,10.5
  TOP w0.3: P2.2@76,40.73 76.286,40.73 77.156,41.6 89.9,41.6 93.1,38.4 93.1,21.3 89.8,18 v1(88.9,18)
  INT1 w0.3: v1(7,10.5) 7.65,10.5 15.65,2.5 80,2.5 88.7,11.2 88.7,17.746 88.9,17.946 v1(88.9,18) ; v1(55.49,42.288) 59.302,46.1 71.1,46.1 75.79,41.41 75.79,40.94 P2.2@76,40.73
  BOT w0.2: U1.29@52.538,42.058 52.699,41.898 52.731,41.898 53.116,42.283 v1@55.354,42.283 ; v1(55.49,42.288) 55.879,42.677 56.869,42.677 R26.1@56.905,42.712
CAM_I2C_SDA: P2.1 R7.2 R9.2 R11.2 R12.2 R25.1 TP22.1 U1.28 | length 184.9
  TOP w0.2: R9.2@5.425,15.5 v1(7,15.5) R12.2@8.575,15.5 ; v1(54.995,42.783) 55,42.788 56.112,42.788 59.1,39.8 59.1,37.4 TP22.1@60.5,36 ; R7.2@86.425,15.5 v1(88,15.5) R11.2@89.575,15.5
  TOP w0.3: P2.1@76,43.27 77.17,42.1 90.1,42.1 93.6,38.6 93.6,21.1 v1(88,15.5)
  INT1 w0.3: v1(7,15.5) 7,11.8 15.8,3 79.6,3 88,11.4 v1(88,15.5) ; v1(54.995,42.783) 55.049,42.783 58.957,46.691 72.579,46.691 P2.1@76,43.27
  BOT w0.2: U1.28@52.538,42.942 52.699,43.102 52.731,43.102 53.056,42.778 v1@54.857,42.778 ; v1(54.995,42.783) 55.915,43.702 R25.1@55.915,43.844
CFG0: R32.1 R35.2 TP34.1 U1.4 | length 25.3
  TOP w0.2: v1(42,45) 42.4,45.4 53.1,45.4 53.921,44.579 58.879,44.579 59.342,45.042 59.867,45.042 v1(60,45.175) R32.1@60,46.375
  INT1 w0.3: v1(60,45.175) 60,42.5 v1(60.5,42)
  BOT w0.2: v1(42,45) 42.025,44.975 42.55,44.975 U1.4@43.523,44.003
CKA_N: C69.2 U1.40 | length 13.2
  BOT w0.152: U1.40@48.649,38.169 48.915,37.903 49.055,37.903 50.925,36.033 50.925,29.698 52.38,28.243 52.38,28.235 52.824,27.791 52.824,27.665 52.471,27.311 52.471,26.943 C69.2@52.486,26.928
CKA_P: C68.2 U1.39 | length 13.2
  BOT w0.152: U1.39@49.003,38.523 49.269,38.256 49.269,38.116 51.227,36.158 51.227,29.823 52.682,28.368 52.682,28.36 53.037,28.004 53.163,28.004 53.517,28.358 53.885,28.358 C68.2@53.9,28.342
CKB_N: C41.1 U1.46 | length 13.2
  BOT w0.152: C41.1@41.121,28.343 41.136,28.358 41.504,28.358 41.858,28.004 41.983,28.004 42.791,28.812 42.791,28.816 43.998,30.023 43.998,36.383 45.731,38.116 45.731,38.256 U1.46@45.997,38.523
CKB_P: C38.1 U1.45 | length 13.2
  BOT w0.152: C38.1@42.535,26.928 42.55,26.944 42.55,27.312 42.197,27.665 42.197,27.791 43.093,28.687 43.093,28.691 44.3,29.898 44.3,36.258 45.945,37.903 46.085,37.903 U1.45@46.351,38.169
CKC_N: C27.1 U1.34 | length 13.2
  BOT w0.152: U1.34@50.77,40.29 51.037,40.024 51.177,40.024 53.103,38.098 59.5,38.098 61.305,36.293 61.305,36.167 60.935,35.797 60.935,35.429 C27.1@60.95,35.414
CKC_P: C24.1 U1.33 | length 13.2
  BOT w0.152: U1.33@51.124,40.644 51.39,40.378 51.39,40.238 53.228,38.4 59.625,38.4 61.519,36.506 61.644,36.506 61.981,36.843 62.349,36.843 C24.1@62.364,36.828
CKF_N: C71.2 U1.52 | length 13.2
  BOT w0.152: C71.2@32.62,36.813 32.636,36.828 33.004,36.828 33.357,36.475 33.483,36.475 34.178,37.169 34.192,37.169 35.423,38.4 41.772,38.4 43.61,40.238 43.61,40.378 U1.52@43.876,40.644
CKF_P: C70.2 U1.51 | length 13.2
  BOT w0.152: C70.2@34.035,35.399 34.05,35.414 34.05,35.782 33.696,36.135 33.696,36.261 34.303,36.867 34.317,36.867 35.548,38.098 41.897,38.098 43.823,40.024 43.963,40.024 U1.51@44.23,40.29
CSI0_CK_N: C27.2 J1.8 | length 38.9
  TOP w0.172: v1(64.304,32.546) 64.313,32.537 65.019,32.537 69.83,27.726 75.17,22.387 75.33,22.226 80.613,22.226 84.008,25.62 84.008,27.979 82.825,29.162 82.825,29.305 82.859,29.339 82.859,29.641 J1.8@82.487,30.013 82.116,30.384 81.814,30.384 81.78,30.35 81.637,30.35 80.244,31.743 80.244,31.886 80.278,31.92 80.278,32.222 J1.8@79.836,32.664
  BOT w0.172: C27.2@61.627,34.737 61.642,34.722 61.996,34.722 62.341,35.067 62.483,35.067 63.545,34.005 63.545,33.977 64.417,33.105 64.417,32.962 64.304,32.849 v1(64.304,32.546)
CSI0_CK_P: C24.2 J1.9 | length 38.8
  TOP w0.172: v1(65.221,33.429) 65.213,33.42 65.213,32.731 69.944,28 75.222,22.722 75.444,22.5 80.5,22.5 83.734,25.734 83.734,27.866 82.631,28.968 82.488,28.968 82.454,28.934 82.152,28.934 J1.9@81.78,29.305 81.409,29.677 81.409,29.979 81.443,30.013 81.443,30.156 80.05,31.549 79.907,31.549 79.873,31.515 79.571,31.515 J1.9@79.129,31.957
  BOT w0.172: C24.2@63.041,36.151 63.056,36.136 63.056,35.782 62.711,35.437 62.711,35.295 63.053,34.953 63.114,34.892 63.868,34.138 63.964,34.042 64.242,34.32 64.544,34.019 64.251,33.726 64.553,33.425 64.614,33.364 64.645,33.333 64.788,33.333 64.884,33.429 v1(65.221,33.429)
CSI0_CKALT_N: C69.1 J2.8 | length 39.5
  TOP w0.172: J2.8@62.298,15.101 62.74,14.659 62.74,14.357 62.706,14.323 62.706,14.18 64.099,12.787 64.242,12.787 64.276,12.821 64.579,12.821 J2.8@64.95,12.45 65.321,12.079 65.321,11.776 65.287,11.742 65.287,11.599 65.539,11.347 65.539,11.329 66.247,10.622 66.578,10.622 v1(66.6,10.6)